# Altium PCB XPIRL_0V0.PCBDOC (part 1 of 4)
Units mil, origin at the board's own origin, x right, y up, seen from the top; angles counter-clockwise.
Board outline 3497.26 x 1372.5 mil, 6 copper layers (Top Layer, Mid-Layer 1, Mid-Layer 2, Mid-Layer 3, Mid-Layer 4, Bottom Layer); 217 components, 126 nets, 782 pads, 361 vias.
Unrouted connection lines stored in the file: 96.
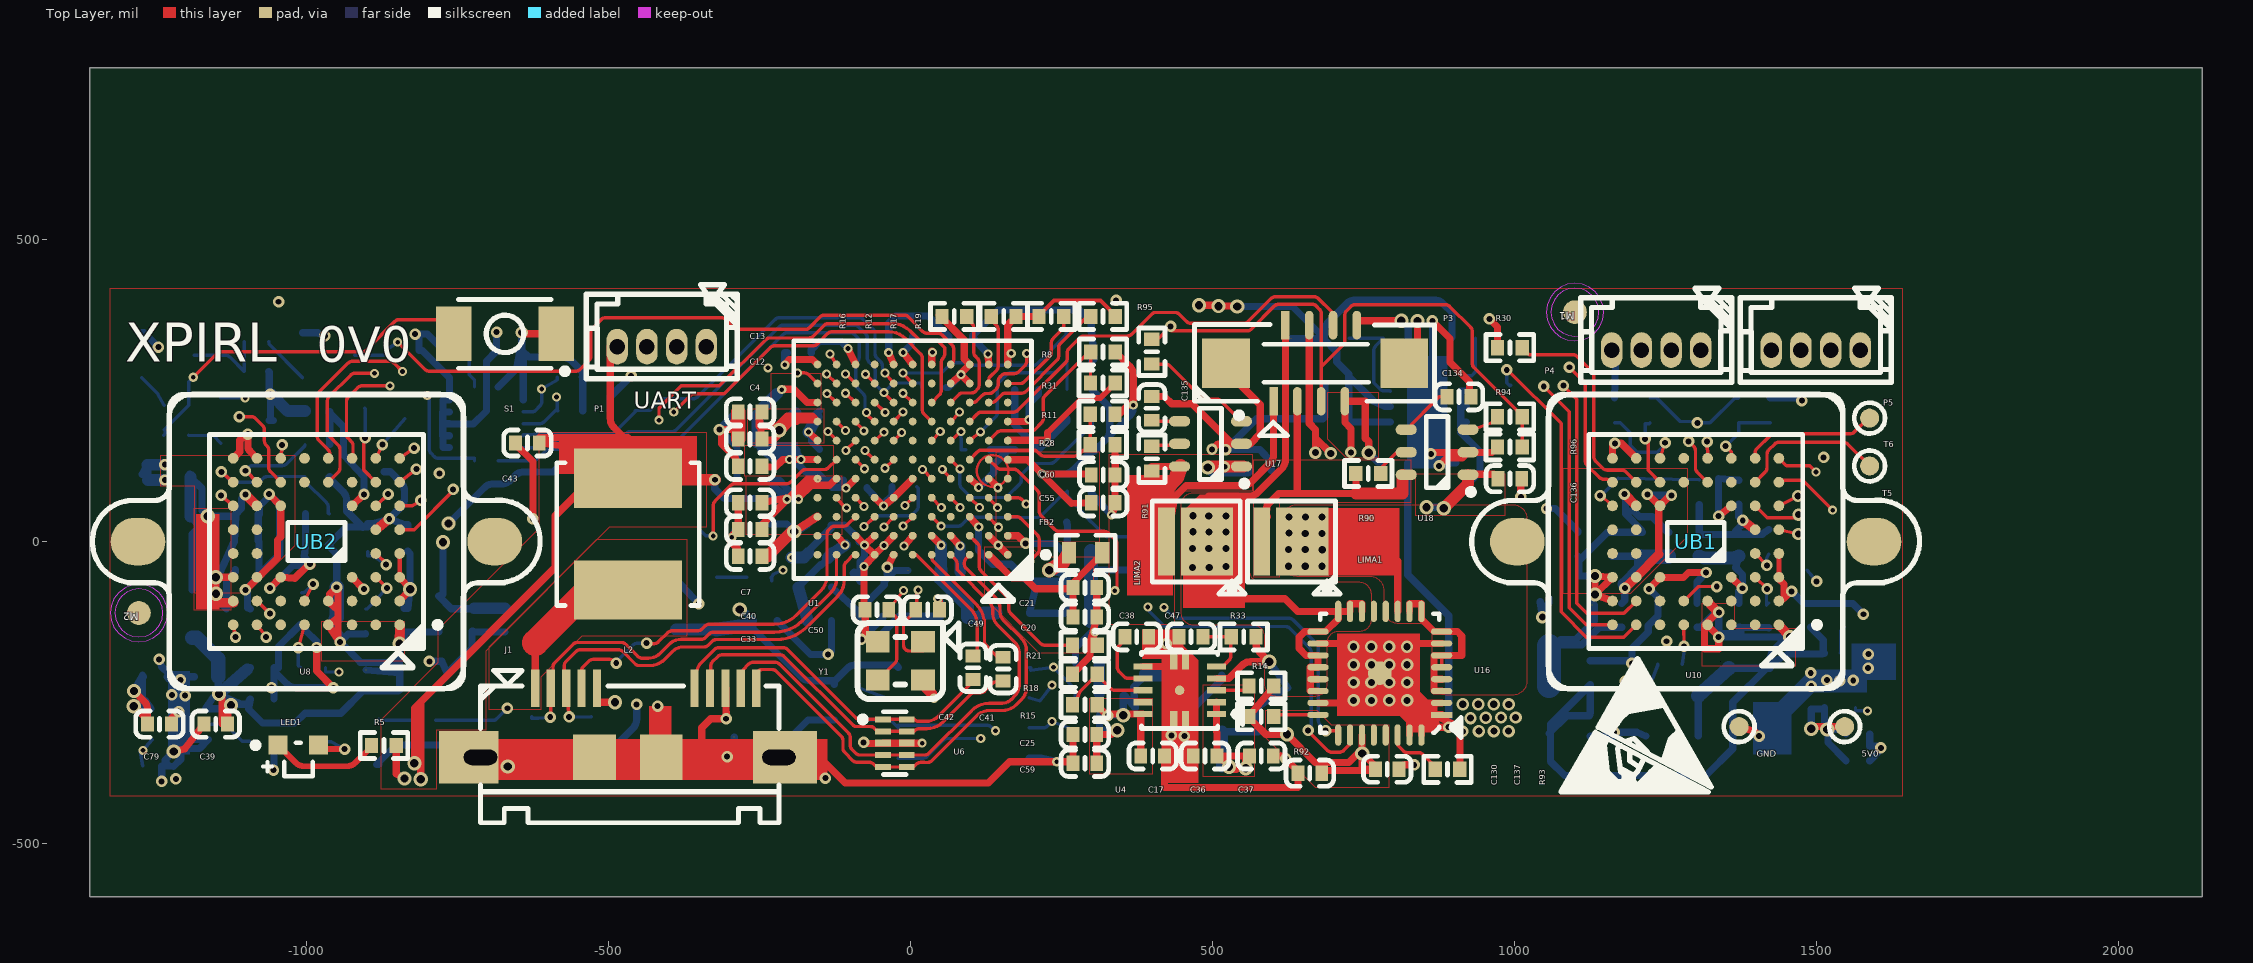
[diagram p0: Top Layer view]
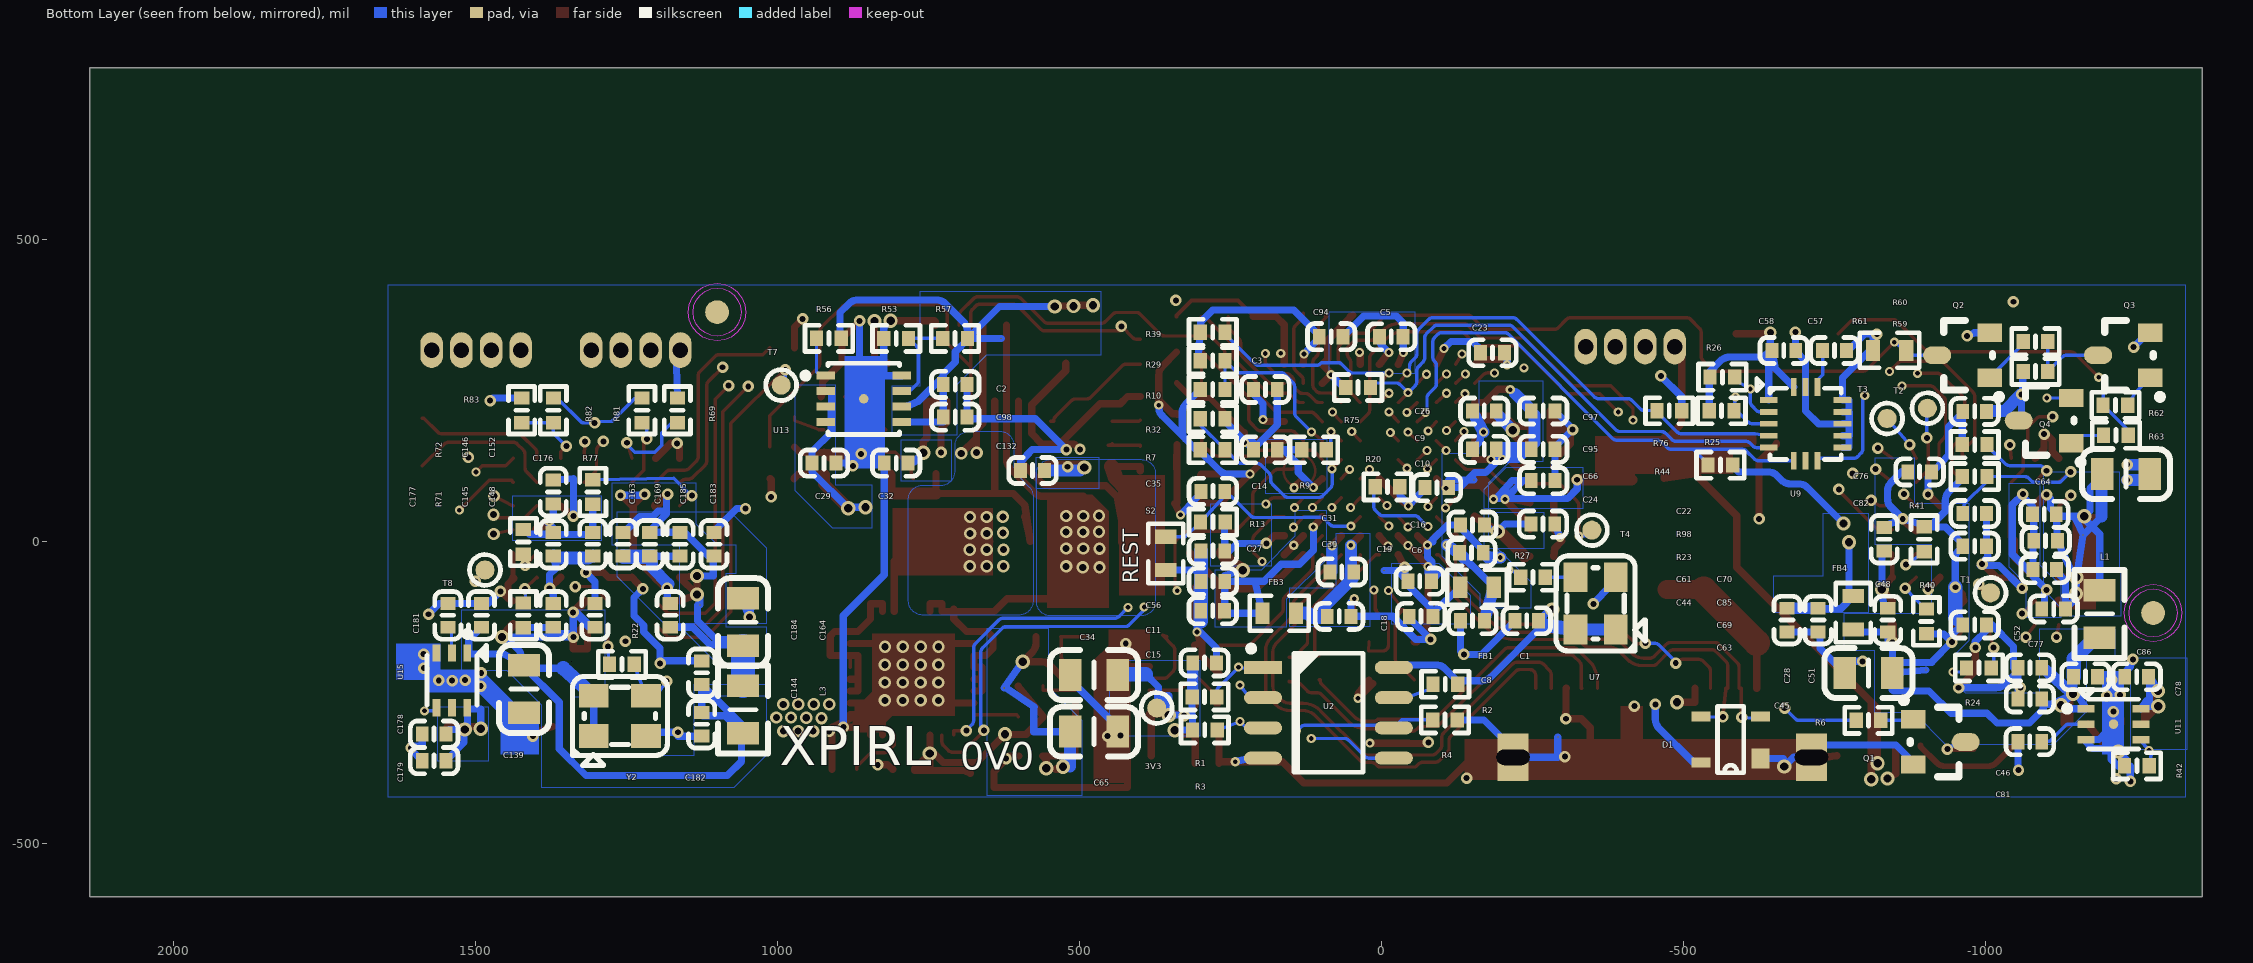
[diagram p1: Bottom Layer view, seen from below]
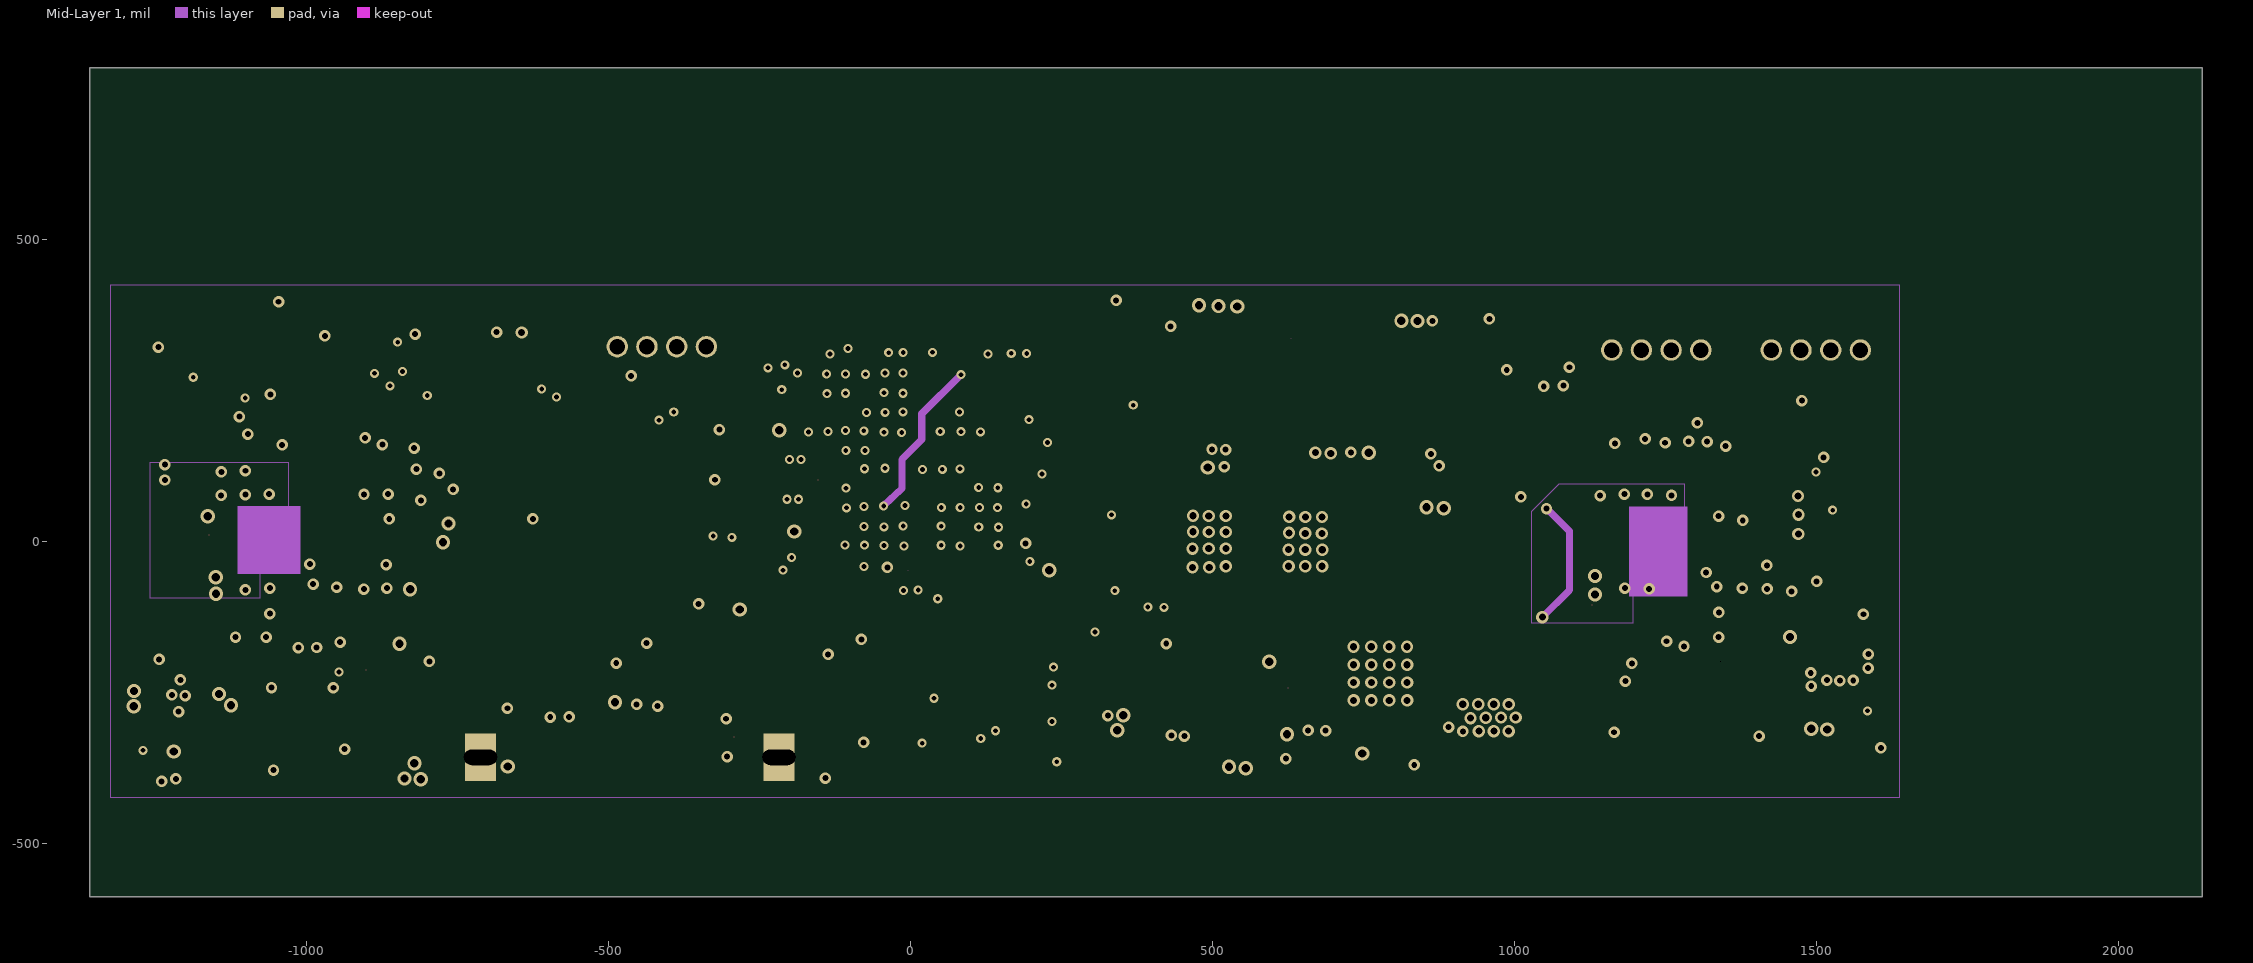
[diagram p2: Mid-Layer 1]
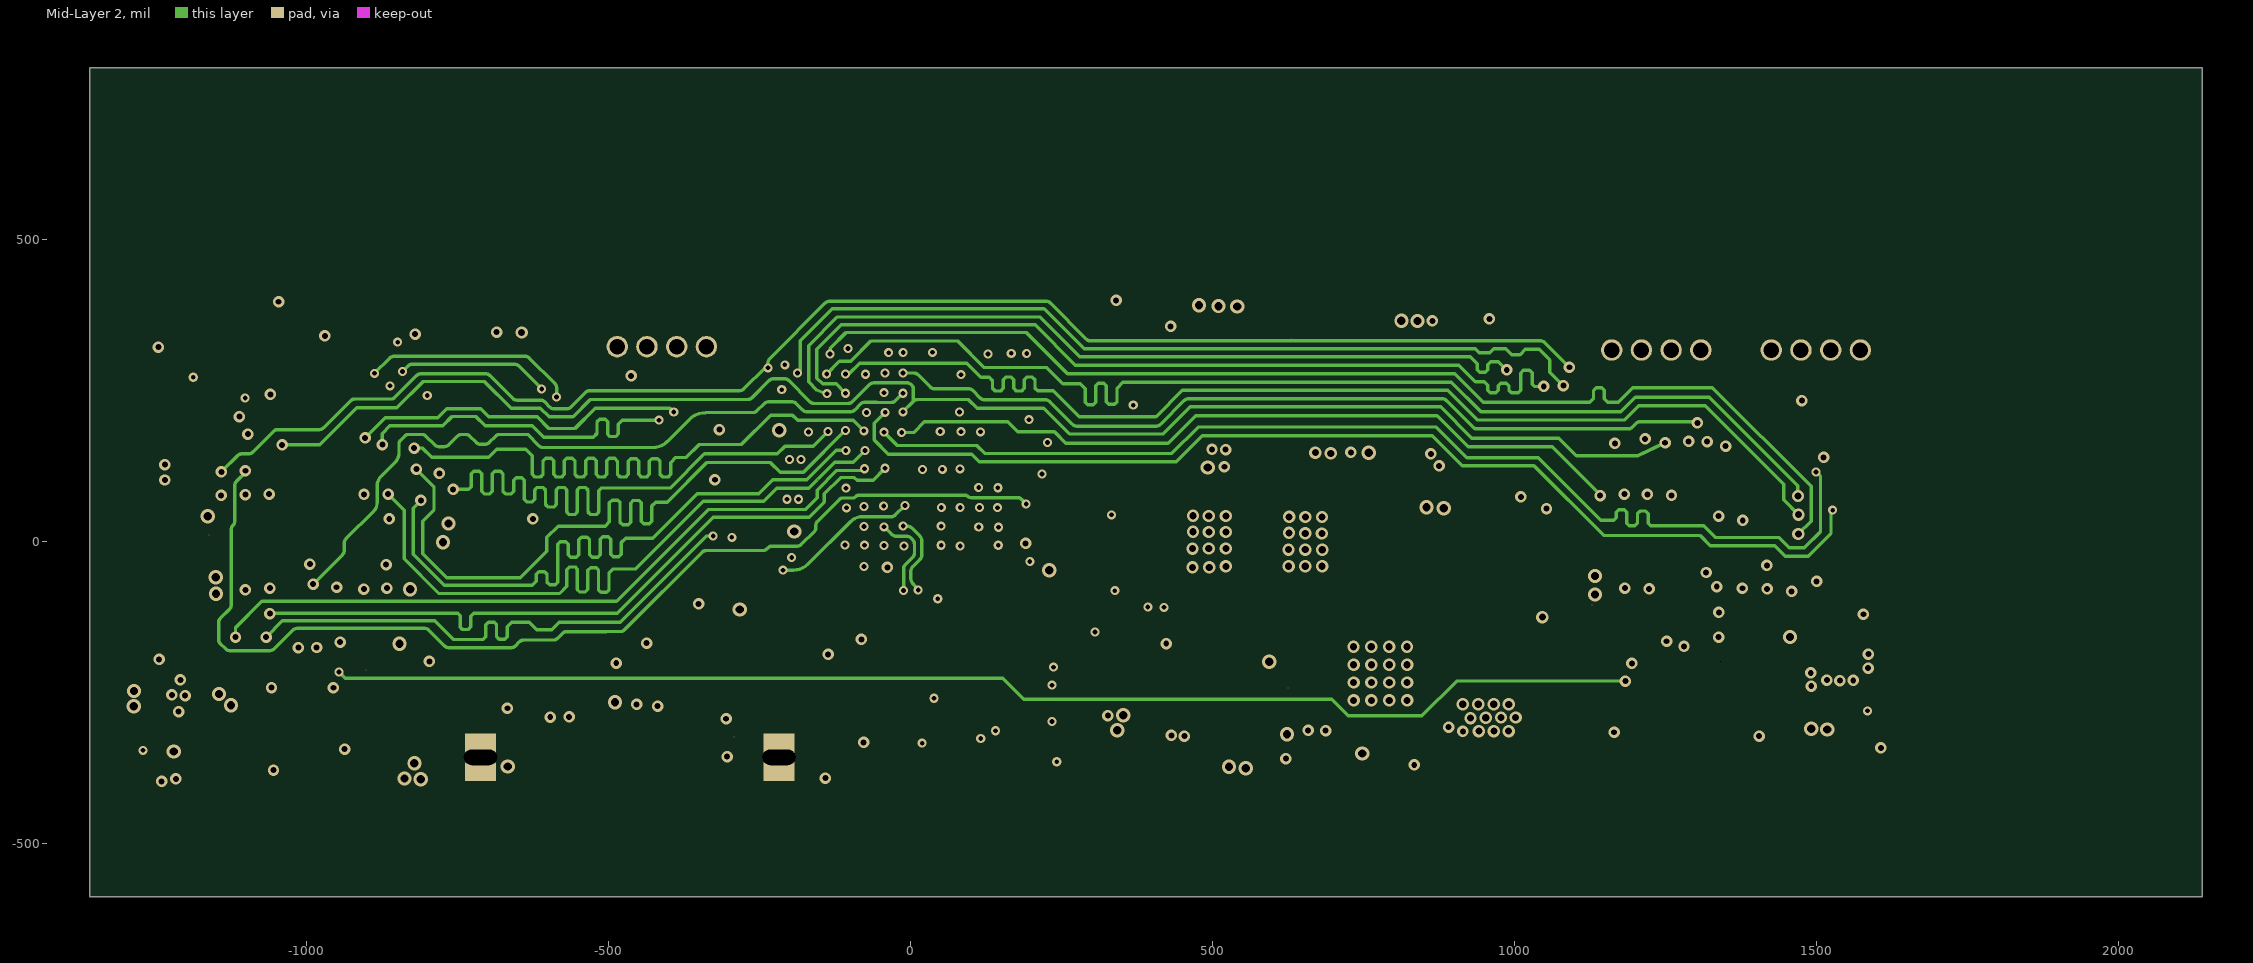
[diagram p3: Mid-Layer 2]
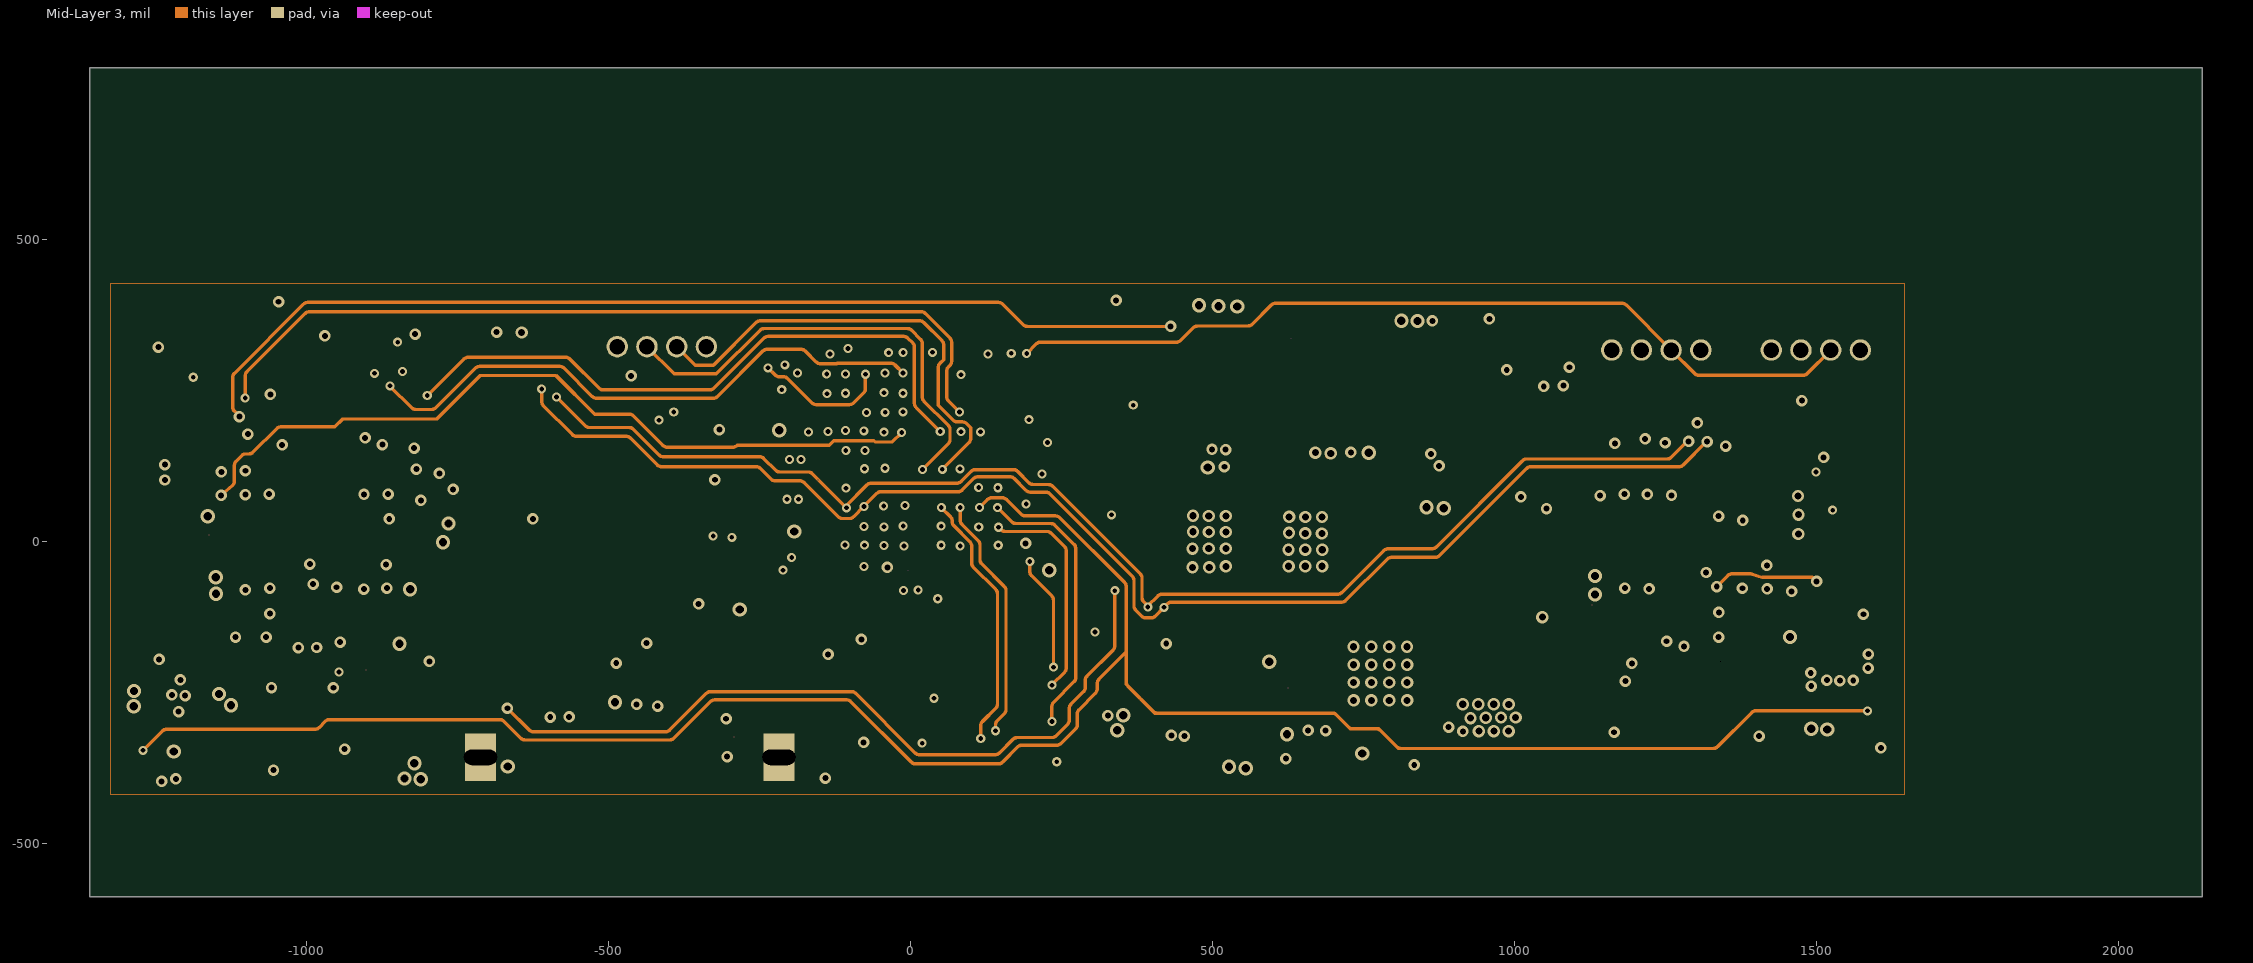
[diagram p4: Mid-Layer 3]
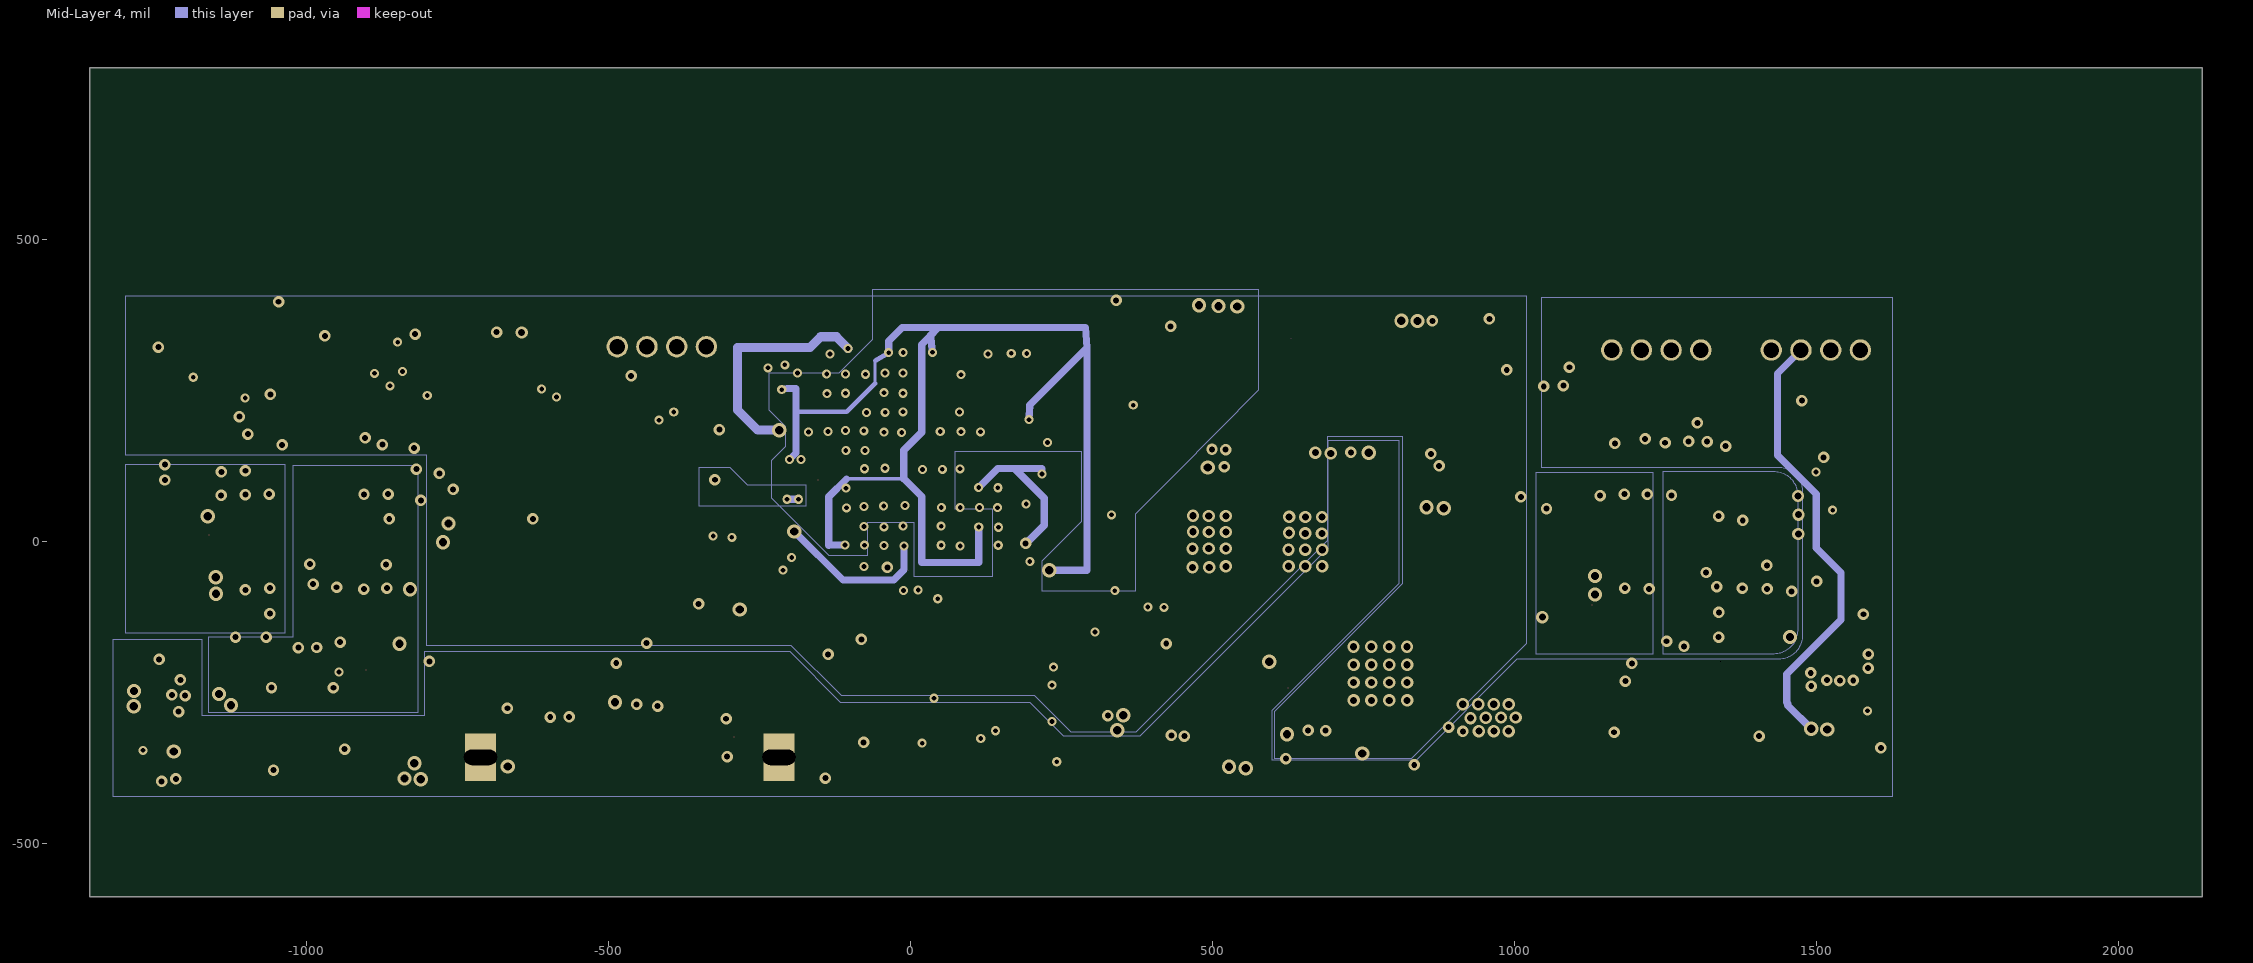
[diagram p5: Mid-Layer 4]

## Layer stack, top to bottom
Top Layer: signal copper 1.4
Dielectric: dielectric 12.6, FR-4, Dk 4.8
Mid-Layer 1: signal copper 1.4
Dielectric: dielectric 12.6, FR-4, Dk 4.8
Mid-Layer 2: signal copper 1.4
Dielectric: dielectric 12.6, FR-4, Dk 4.8
Mid-Layer 3: signal copper 1.4
Dielectric: dielectric 12.6, FR-4, Dk 4.8
Mid-Layer 4: signal copper 1.4
Dielectric: dielectric 12.6, FR-4, Dk 4.8
Bottom Layer: signal copper 1.4

## Board outline
-1359.44,-588.07 2137.81,-588.07 2137.81,784.43 -1359.44,784.43

## Design rules (kind name [scope] priority, off if disabled: settings)
Clearance [All] p1: gap=10
PlaneConnect "Power Plane Connect Style - pads with no thermal" [(Name='J1-13') Or (Name='M1-1') Or (Name='M2-1') Or (Name='P1-1') Or (Name='U1-FID1') Or (Name='U1-FID2') Or (Name='UB1-1') Or (Name='UB2-1')] p1: planeconnectstyle=NoConnect reliefexpansion=20 reliefentries=4 reliefconductorwidth=10 reliefairgap=10 // PAD - No Thermal Connect Rule
PlaneConnect "Power Plane Connect Style - from global settings" [All] p2: planeconnectstyle=Relief reliefexpansion=20 reliefentries=2 reliefconductorwidth=11.81 reliefairgap=10
PolygonConnect [All] p1: connectstyle=Relief reliefconductorwidth=10 reliefentries=4 polygonreliefangle="90 Angle"
RoutingVias [All] p1: holewidth=28 width=50 viastyle="Through Hole" minholewidth=28 minwidth=50 maxholewidth=28 maxwidth=50
SilkscreenOverComponentPads [All] p1: minsilkscreentomaskgap=10
SolderMaskExpansion "Solder Mask Expansion from CAM settings" [All] p1: expansion=2
Width [All] p1: maxlimit=10 minlimit=10 preferedwidth=10
26 further rules are at their usual default settings.

## Components (designator, comment, footprint, x,y, rotation, side; value= is the part's Value field where it differs from the comment)
3V3 "PAD_TP_D1.2B" PAD_TP_D1.2B 371.44,-275.44 r0 bottom
5V0 "PAD_TP_D1.2B" PAD_TP_D1.2B 1545.81,-306.32 r180 top
C1 "0.1uF" 0402C_L -241.15,-131.06 r180 bottom
C2 "4.7u" 0402C_L 705.07,260.27 r180 bottom
C3 "0.1uF" 0402C_L 191.55,251.8 r0 bottom
C4 "0.1uF" 0402C_L -266.2,124.55 r0 top
C5 "0.1uF" 0402C_L -16.84,339.13 r180 bottom
C6 "0.1uF" 0402C_L -149.56,-18.4 r0 bottom
C7 "4.7uF" 0402C_L -266.2,64.27 r0 top
C8 "0.1uF" 0402C_L -151.29,-131.06 r180 bottom
C9 "0.1uF" 0402C_L -170.92,152.73 r180 bottom
C10 "0.1uF" 0402C_L -92.45,89.35 r180 bottom
C11 "0.1uF" 0402C_L 278.79,-114.34 r180 bottom
C12 "0.1uF" 0402C_L -266.2,169.63 r0 top
C13 "0.01uF" 0402C_L -266.2,214.63 r0 top
C14 "0.1uF" 0402C_L 191.55,152 r180 bottom
C15 "0.1uF" 0402C_L 292.19,-200.8 r0 bottom
C16 "0.01uF" 0402C_L -151.44,27.51 r180 bottom
C17 "0.01uF" 0402C_L 400.23,-355.01 r180 top
C18 "4.7u" 0402C_L -66.19,-123.8 r0 bottom
C19 "0.1uF" 0402C_L -64.03,-65.49 r0 bottom
C20 "4.7u" 0402C_L 288.01,-124.95 r0 top
C21 "0.1uF" 0402C_L 288.01,-76.2 r180 top
C22 "0.01uF" 0402C_L -982.65,215.55 r180 bottom
C23 "0.1uF" 0402C_L -184.51,312.61 r0 bottom
C24 "4.7uF" 0402C_L -267.94,29.01 r0 bottom
C25 "4.7uF" 0402C_L 288.01,-319.48 r0 top
C26 "0.1uF" 0402C_L -170.92,216.22 r180 bottom
C27 "0.01uF" 0402C_L 278.43,-15.42 r180 bottom
C28 "4.7uF" 0402C_L -672.01,-129.97 r90 bottom
C29 "0.1uF" 0402C_L 922.28,129.94 r0 bottom
C30 "4.7u" 0402C_L 69.44,-123.8 r180 bottom
C31 "0.1uF" 0402C_L 64.97,-50.26 r180 bottom
C32 "4.7uF" 0402C_L 802.78,129.94 r0 bottom
C33 "0.1uF" 0402C_L -266.2,-24.44 r0 top
C34 "10uF" 0805C 475.33,-221.09 r180 bottom
C35 "0.1uF" 0402C_L 278.43,83.11 r180 bottom
C36 "2.2u" 0402C_L 487.04,-355.01 r180 top
C37 "0.1uF" 0402C_L 580.13,-355.01 r180 top
C38 "NC" 0402C_L 374.01,-157.68 r180 top
C39 "4.7uF" 0402C_L -1150.88,-302.13 r0 top
C40 "0.1uF" 0402C_L -266.2,20.02 r180 top
C41 "0.1uF" 0402C_L 152.57,-211.1 r270 top
C42 "0.1uF" 0402C_L 102.87,-208.84 r270 top
C43 "4.7uF" 0402C_L -634.88,163.28 r0 top
C44 "4.7uF" 0402C_L -982.65,-7.59 r0 bottom
C45 "10uF" 0805C -807,-217.72 r180 bottom
C46 "0.1uF" 0402C_L -1074.18,-260.61 r180 bottom
C47 "0.1UF" 0402C_L 463.62,-157.68 r0 top
C48 "0.1uF" 0402C_L -838.86,-129.97 r270 bottom
C49 "12pF" 0402C_L 27.67,-112.8 r180 top
C50 "12pF" 0402C_L -56.33,-112.8 r180 top
C51 "0.1uF" 0402C_L -723.52,-129.97 r90 bottom
C52 "0.01uF" 0402C_L -982.65,-137.92 r0 bottom
C55 "4.7u" 0402C_L 318.31,64.2 r0 top
C56 "4.7u" 0402C_L 278.43,-65.89 r0 bottom
C57 "0.47uF" 0402C_L -750.63,316.43 r0 bottom
C58 "0.1uF" 0402C_L -666.74,316.43 r0 bottom
C59 "0.1uF" 0402C_L 288.01,-367.12 r0 top
C60 "4.7uF" 0402C_L 318.29,110.35 r180 top
C61 "0.1uF" 0402C_L -982.65,46.33 r0 bottom
C63 "4.7uF" 0402C_L -1113.47,-111.49 r180 bottom
C64 "10uF" 0805C -1233.37,111.65 r0 bottom
C65 "10uF" 0805C 475.33,-314.68 r0 bottom
C66 "0.01uF" 0402C_L -268.41,100.99 r0 bottom
C69 "0.1uF" 0402C_L -1098.77,-46.39 r180 bottom
C70 "4.7uF" 0402C_L -1098.07,45.32 r180 bottom
C76 "4.7u" 0402C_L -891.57,115.42 r180 bottom
C77 "0.1uF" 0402C_L -1074.18,-209.05 r180 bottom
C78 "0.1uF" 0402C_L -1250.97,-223.77 r180 bottom
C79 "1uF" 0402C_L -1244.03,-302.13 r180 top
C81 "0.01uF" 0402C_L -1074.09,-331.23 r180 bottom
C82 "0.1uF" 0402C_L -833,3.86 r90 bottom
C85 "1nF" 0402C_L -1100.17,1.21 r180 bottom
C86 "4.7uF" 0402C_L -1166.28,-223.77 r0 bottom
C94 "0.01uF" 0402C_L 82.62,339.24 r180 bottom
C95 "4.7uF" 0402C_L -268.41,152.73 r0 bottom
C97 "0.01uF" 0402C_L -268.41,216.22 r0 bottom
C98 "0.01uF" 0402C_L 705.07,206.16 r0 bottom
C130 "4.7uF" 0402C_L 660.46,-383.38 r0 top
C132 "1uF" 0402C_L 577.02,117.75 r180 bottom
C134 "10pF" 0402C_L 907.45,239.71 r180 top
C135 "10pF" 0402C_L 398.79,220.59 r270 top
C136 "4.7uF" 0402C_L 991.61,104.18 r180 top
C137 "0.1uF" 0402C_L 788.63,-376.88 r180 top
C139 "10uF" 0805C 1418.8,-243.92 r90 bottom
C144 "4.7uF" 0402C_L 1124.77,-217.14 r270 bottom
C145 "4.7uF" 0402C_L 1370.55,-122.13 r270 bottom
C146 "0.1uF" 0402C_L 1370.55,-4.43 r90 bottom
C148 "0.01uF" 0402C_L 1301.53,-122.13 r270 bottom
C152 "4.7uF" 0402C_L 1305.01,-4.43 r90 bottom
C163 "4.7uF" 0402C_L 1255.02,-4.43 r90 bottom
C164 "10uF" 0805C 1056.31,-133.34 r270 bottom
C169 "0.1uF" 0402C_L 1210.62,-4.43 r90 bottom
C176 "4.7u" 0402C_L 1370.55,82.04 r90 bottom
C177 "0.1uF" 0402C_L 1489.27,-122.13 r270 bottom
C178 "0.1uF" 0402C_L 1567.75,-318.64 r180 bottom
C179 "4.7uF" 0402C_L 1567.75,-362.77 r180 bottom
C181 "0.01uF" 0402C_L 1544.95,-122.13 r270 bottom
C182 "0.1uF" 0402C_L 1124.77,-302.4 r90 bottom
C183 "0.1uF" 0402C_L 1104.34,-4.43 r270 bottom
C184 "0.01uF" 0402C_L 1176.98,-122.13 r270 bottom
C185 "1nF" 0402C_L 1160.58,-4.43 r90 bottom
D1 "PSR05" SOT-143 -578.71,-327.66 r0 bottom
FB1 "600@100MHz" 0603R -158.79,-75.64 r180 bottom
FB2 "600@100MHz" 0603R 289.15,-18.36 r180 top
FB3 "600@100MHz" 0603R 168.59,-118.5 r0 bottom
FB4 "600@100MHz" 0603R -781.89,-117.8 r90 bottom
GND "PAD_TP_D1.2B" PAD_TP_D1.2B 1371.16,-306.32 r180 top
J1 "USB3_MICROB" USB3_P65L130W51H28_TH -570.87,-414.21 r0 top
L1 "10uH" 0805R -1189.64,-119.64 r90 bottom
L2 "100uH" IND_L60W60H42_HPC6045 -468.39,12.36 r90 top
L3 "10uH" 0805R 1056.31,-278.25 r90 bottom
LED1 "LED0603" LED0603A_L170W06H06 -1014.02,-337.13 r180 top
LIMA1 "LIMA" LEDM_L35W34H36_BELICE_A 629.92,0 r0 top
LIMA2 "LIMA" LEDM_L35W34H36_BELICE_A 472.44,0 r0 top
M1 "PAD_MARK_D1-2" PAD_MARK_D1-2 1099.32,379.85 r180 top
M2 "PAD_MARK_D1-2" PAD_MARK_D1-2 -1278.12,-118.2 r180 top
P1 "UART" WAFER4_P1.25L6.25W3.4H4.3 -338.58,322.73 r180 top
P3 "FPC_8H" FPC8_P50L102L40W30H40 669.29,295.28 r90 top
P4 "UART" WAFER4_P1.25L6.25W3.4H4.3 1307.76,317.13 r180 top
P5 "UART" WAFER4_P1.25L6.25W3.4H4.3 1571.88,317.13 r180 top
Q1 "BC817" SOT-23L -922.51,-331.65 r180 bottom
Q2 "BC817" SOT-23L -965.93,308.54 r0 bottom
Q3 "BC817" SOT-23L -1232.2,308.54 r0 bottom
Q4 "BC817" SOT-23L -1100.97,200.45 r0 bottom
R1 "4.7K" 0402R_L 292.38,-257.13 r180 bottom
R2 "4.7K" 0402R_L -106.29,-236.18 r180 bottom
R3 "4.7K" 0402R_L 291.8,-311.75 r180 bottom
R4 "100K" 0402R_L -105.86,-295.26 r0 bottom
R5 "1K" 0402R_L -872.42,-337.66 r180 top
R6 "200R" 0402R_L -807,-295.95 r180 bottom
R7 "NC" 0402R_L 278.79,152 r0 bottom
R8 "4.7K" 0402R_L 318.04,313.94 r0 top
R9 "10K" 0402R_L 111.05,152 r180 bottom
R10 "NC" 0402R_L 278.79,251.8 r0 bottom
R11 "NC" 0402R_L 317.54,210.71 r0 top
R12 "4.7K" 0402R_L 153.62,372.74 r0 top
R13 "100K" 0402R_L 278.43,32.32 r0 bottom
R14 "1K" 0402R_L 580.13,-238.88 r180 top
R15 "4.7K" 0402R_L 288.01,-270.15 r180 top
R16 "4.7K" 0402R_L 71.91,372.74 r180 top
R17 "4.7K" 0402R_L 232.42,372.74 r180 top
R18 "1.5K" 0402R_L 288.01,-219.67 r180 top
R19 "4.7K" 0402R_L 318.04,372.74 r0 top
R20 "6.04K" 0402R_L -10.69,90.67 r180 bottom
R21 "200R" 0402R_L 288.01,-171.75 r0 top
R22 "0R" 0402R_L 1256.79,-203.17 r180 bottom
R23 "10K" 0402R_L -982.65,107.66 r0 bottom
R24 "22R" 0402R_L -989.73,-209.07 r0 bottom
R25 "2.2K" 0402R_L -563.73,216.62 r180 bottom
R26 "2.2K" 0402R_L -565.05,272.34 r180 bottom
R27 "22R" 0402R_L -251.55,-59.07 r180 bottom
R28 "4.7K" 0402R_L 317.54,160.43 r0 top
R29 "4.7K" 0402R_L 278.79,299.33 r0 bottom
R30 "0R" 0402R_L 991.61,320.99 r180 top
R31 "NC\" 0402R_L 317.79,262.58 r0 top
R32 "4.7K" 0402R_L 278.79,203.25 r180 bottom
R33 "6.04K" 0402R_L 550.89,-157.68 r180 top
R39 "10K" 0402R_L 278.79,346.6 r0 bottom
R40 "10K" 0402R_L -902.82,-132.14 r270 bottom
R41 "10K" 0402R_L -899.16,3.86 r90 bottom
R42 "10K" 0402R_L -1251.31,-371.21 r0 bottom
R44 "10K" 0402R_L -561.74,126.67 r180 bottom
R53 "30.1K" 0402R_L 802.78,336.32 r0 bottom
R56 "100K" 0402R_L 914.19,336.49 r0 bottom
R57 "0R" 0402R_L 705.26,336.32 r0 bottom
R59 "1K" 0402R_L -1083.42,281.57 r0 bottom
R60 "22R" 0402R_L -1083.42,331.03 r180 bottom
R61 "NC" 0603R -841.78,316.43 r180 bottom
R62 "1k" 0402R_L -1215.76,225.7 r180 bottom
R63 "1k" 0402R_L -1216.54,176.12 r0 bottom
R69 "4.7K" 0402R_L 1164.93,217.33 r270 bottom
R71 "10K" 0402R_L 1420,-122.13 r270 bottom
R72 "10K" 0402R_L 1420,-0.6 r90 bottom
R75 "4.7K" 0402R_L 38.04,255.1 r180 bottom
R76 "4.7K" 0402R_L -477.13,216.62 r0 bottom
R77 "4.7K" 0402R_L 1305.01,82.04 r270 bottom
R81 "10K" 0402R_L 1223.66,217.33 r90 bottom
R82 "10K" 0402R_L 1370.31,217.33 r270 bottom
R83 "10K" 0402R_L 1422.82,217.33 r90 bottom
R90 "100R" 0402R_L 757.13,112.69 r0 top
R91 "100R" 0402R_L 398.79,137.25 r90 top
R92 "10k" 0402R_L 580.13,-289.7 r180 top
R93 "158R" 0402R_L 888.39,-377.05 r0 top
R94 "0R" 0402R_L 991.61,206.55 r0 top
R95 "0R" 0402R_L 398.79,314.35 r90 top
R96 "4.7k" 0402R_L 991.61,156.58 r0 top
R98 "4.7K" 0402R_L -982.65,160.6 r180 bottom
S1 "N_RL" SW_L40W30H25_MPTFP -672.07,343.88 r180 top
S2 "Reset" 0603R 356.5,-19.59 r270 bottom
T1 "CON1" PAD_TP_D1.2B -1008.93,-84.89 r180 bottom
T2 "CON1" PAD_TP_D1.2B -904.49,220.76 r180 bottom
T3 "CON1" PAD_TP_D1.2B -837.71,203.79 r0 bottom
T4 "CON1" PAD_TP_D1.2B -349.06,19.02 r180 bottom
T5 "CON1" PAD_TP_D1.2B 1587.13,125.22 r0 top
T6 "CON1" PAD_TP_D1.2B 1587.13,204.45 r0 top
T7 "CON1" PAD_TP_D1.2B 993.14,259.01 r180 bottom
T8 "CON1" PAD_TP_D1.2B 1483.52,-46.98 r180 bottom
U1 "CYUSB3014" FBGA121_P80L100W100H11 2.88,135.69 r180 top
U2 "M25P40-VMN3TPB" SO8N_P127L50W40W62H17 87.14,-283.46 r180 bottom
U4 "TPS74801DRCR" SON10_P50L32W32H10_DRC 444.88,-246.24 r180 top
U6 "SP3010-04UTG" UDFN10_SON_P50L25W10H55 -26.67,-333.74 r0 top
U7 "XTAL-3225" XTAL_3225 -355.14,-102.36 r90 bottom
U8 "MT9V024IA7XTM" IBGA52_8X8_P100L90W90H90R -984.25,0 r180 top
U9 "ICM-20608-G" LGA16_P50L30W30H08 -702.78,194.99 r180 bottom
U10 "MT9V024IA7XTM" IBGA52_8X8_P100L90W90H90R 1299.21,0 r180 top
U11 "TPS73533" SON6_P65L21W21H8_DRV -1212.6,-302.19 r180 bottom
U13 "AS1364-BTDT-AD" TDFN8_P65L30W30H08 856.46,236.35 r180 bottom
U15 "TPS73533" SON6_P65L21W21H8_DRV 1538.21,-229.73 r270 bottom
U16 "TLC59116IRHBR" QFN32_P5L50W50H10 776.24,-217.93 r180 top
U17 "TPS22918DBVT" SOT23-6_P95L300W280H120 496.06,161.73 r180 top
U18 "TPS22918DBVT" SOT23-6_P95L300W280H120 871.14,148.01 r180 top
UB1 "PAD_D6-D3.4" PAD_D6-D3.4 1299.21,0 r0 top
UB2 "PAD_D6-D3.4" PAD_D6-D3.4 -984.25,0 r0 top
Y1 "19.2MHz--2520" XATL2520L_L25W20H06 -17.39,-197.57 r270 top
Y2 "HSO531S_3225 27Mhz" XTAL_3225 1260.1,-288.58 r180 bottom

## Footprints (in the part's own frame and the unit in brackets; to place one, negate y for a bottom-side part, rotate by r counter-clockwise, add the part's x,y. Pads: shape width x height; smd on the part's side, far side on the other; paste and mask are expansions set on the pad)
0402C_L [mm]
  rect 0.54x0.64 smd: 1(-0.5,0) 2(0.5,0)
  silkscreen extent -1,-0.55 1,0.55
0402R_L [mm]
  rect 0.56x0.64 smd: 1(-0.52,0) 2(0.52,0)
  silkscreen extent -1,-0.55 1,0.55
0603R [mm]
  rect 0.6x0.9 smd: 1(-0.7,0) 2(0.7,0)
  silkscreen extent -1.25,-0.74 1.25,0.74
0805C [mm]
  rect 0.95x1.35 smd: 1(-1,0) 2(1,0)
  silkscreen extent -1.85,-1.05 1.85,1.05
0805R [mm]
  rect 0.95x1.35 smd: 1(-1,0) 2(1,0)
  silkscreen extent -1.85,-1.05 1.85,1.05
FBGA121_P80L100W100H11 [mm]
  round 0.33 smd: A1(-4,4) A2(-3.2,4) A3(-2.4,4) A4(-1.6,4) A5(-0.8,4) A6(0,4) A7(0.8,4) A8(1.6,4) A9(2.4,4) A10(3.2,4) A11(4,4) B1(-4,3.2) B2(-3.2,3.2) B3(-2.4,3.2) B4(-1.6,3.2) B5(-0.8,3.2) B6(0,3.2) B7(0.8,3.2) B8(1.6,3.2) B9(2.4,3.2) B10(3.2,3.2) B11(4,3.2) C1(-4,2.4) C2(-3.2,2.4) C3(-2.4,2.4) C4(-1.6,2.4) C5(-0.8,2.4) C6(0,2.4) C7(0.8,2.4) C8(1.6,2.4) C9(2.4,2.4) C10(3.2,2.4) C11(4,2.4) D1(-4,1.6) D2(-3.2,1.6) D3(-2.4,1.6) D4(-1.6,1.6) D5(-0.8,1.6) D6(0,1.6) D7(0.8,1.6) D8(1.6,1.6) D9(2.4,1.6) D10(3.2,1.6) D11(4,1.6) E1(-4,0.8) E2(-3.2,0.8) E3(-2.4,0.8) E4(-1.6,0.8) E5(-0.8,0.8) E6(0,0.8) E7(0.8,0.8) E8(1.6,0.8) E9(2.4,0.8) E10(3.2,0.8) E11(4,0.8) F1(-4,0) F2(-3.2,0) F3(-2.4,0) F4(-1.6,0) F5(-0.8,0) F6(0,0) F7(0.8,0) F8(1.6,0) F9(2.4,0) F10(3.2,0) F11(4,0) G1(-4,-0.8) G2(-3.2,-0.8) G3(-2.4,-0.8) G4(-1.6,-0.8) G5(-0.8,-0.8) G6(0,-0.8) G7(0.8,-0.8) G8(1.6,-0.8) G9(2.4,-0.8) G10(3.2,-0.8) G11(4,-0.8) H1(-4,-1.6) H2(-3.2,-1.6) H3(-2.4,-1.6) H4(-1.6,-1.6) H5(-0.8,-1.6) H6(0,-1.6) H7(0.8,-1.6) H8(1.6,-1.6) H9(2.4,-1.6) H10(3.2,-1.6) H11(4,-1.6) J1(-4,-2.4) J2(-3.2,-2.4) J3(-2.4,-2.4) J4(-1.6,-2.4) J5(-0.8,-2.4) J6(0,-2.4) J7(0.8,-2.4) J8(1.6,-2.4) J9(2.4,-2.4) J10(3.2,-2.4) J11(4,-2.4) K1(-4,-3.2) K2(-3.2,-3.2) K3(-2.4,-3.2) K4(-1.6,-3.2) K5(-0.8,-3.2) K6(0,-3.2) K7(0.8,-3.2) K8(1.6,-3.2) K9(2.4,-3.2) K10(3.2,-3.2) K11(4,-3.2) L1(-4,-4) L2(-3.2,-4) L3(-2.4,-4) L4(-1.6,-4) L5(-0.8,-4) L6(0,-4) L7(0.8,-4) L8(1.6,-4) L9(2.4,-4) L10(3.2,-4) L11(4,-4)
  round 1 on Mech16: FID1(-5.85,-5.85) FID2(5.85,5.85)
  silkscreen extent -5.72,-5 5,5
FPC8_P50L102L40W30H40 [mm]
  rect 1.2x0.36 smd: 1(-1.6,1.75) 2(1.6,1.25)
  oval 1.2x0.36 smd: 3(-1.6,0.75) 4(1.6,0.25) 5(-1.6,-0.25) 6(1.6,-0.75) 7(-1.6,-1.25) 8(1.6,-1.75)
  rect 2.1x2 smd: 9(0,3.75) 10(0,-3.75)
  silkscreen extent -3.05,-5.02 1.63,5.07
IBGA52_8X8_P100L90W90H90R [mm]
  round 0.45 smd: A1(-3.5,3.5) A2(-2.5,3.5) A3(-1.5,3.5) A4(-0.5,3.5) A5(0.5,3.5) A6(1.5,3.5) A7(2.5,3.5) A8(3.5,3.5) B1(-3.5,2.5) B2(-2.5,2.5) B3(-1.5,2.5) B4(-0.5,2.5) B5(0.5,2.5) B6(1.5,2.5) B7(2.5,2.5) B8(3.5,2.5) C1(-3.5,1.5) C2(-2.5,1.5) C3(-1.5,1.5) C6(1.5,1.5) C7(2.5,1.5) C8(3.5,1.5) D1(-3.5,0.5) D2(-2.5,0.5) D7(2.5,0.5) D8(3.5,0.5) E1(-3.5,-0.5) E2(-2.5,-0.5) E7(2.5,-0.5) E8(3.5,-0.5) F1(-3.5,-1.5) F2(-2.5,-1.5) F3(-1.5,-1.5) F6(1.5,-1.5) F7(2.5,-1.5) F8(3.5,-1.5) G1(-3.5,-2.5) G2(-2.5,-2.5) G3(-1.5,-2.5) G4(-0.5,-2.5) G5(0.5,-2.5) G6(1.5,-2.5) G7(2.5,-2.5) G8(3.5,-2.5) H1(-3.5,-3.5) H2(-2.5,-3.5) H3(-1.5,-3.5) H4(-0.5,-3.5) H5(0.5,-3.5) H6(1.5,-3.5) H7(2.5,-3.5) H8(3.5,-3.5)
  silkscreen extent -5.23,-4.5 4.5,4.5
IND_L60W60H42_HPC6045 [mm]
  rect 2.5x4.55 smd: 1(-2.35,0) 2(2.35,0)
  silkscreen extent -3,-3 3,3
LED0603A_L170W06H06 [mm]
  rect 0.8x0.8 smd: 1(0.85,0) 2(-0.85,0)
  silkscreen extent -0.6,-0.12 1.92,1.3
LEDM_L35W34H36_BELICE_A [mm]
  rect 0.7x2.85 smd: 1(-1.25,0)
  rect 2.2x2.85 smd: 2(0.45,0)
  silkscreen extent -1.85,-2.2 2.05,1.7
LGA16_P50L30W30H08 [mm]
  rect 0.75x0.24 smd: 1(-1.55,1) 2(-1.55,0.5) 3(-1.55,0) 4(-1.55,-0.5) 5(-1.55,-1) 9(1.55,-1) 10(1.55,-0.5) 11(1.55,0) 12(1.55,0.5) 13(1.55,1)
  rect 0.24x0.75 smd: 6(-0.5,-1.55) 7(0,-1.55) 8(0.5,-1.55) 14(0.5,1.55) 15(0,1.55) 16(-0.5,1.55)
  silkscreen extent -2.05,-1.5 1.5,1.9
PAD_D6-D3.4 [mm]
  round 0 all layers, no hole: 1(0,0)
  oval 2.3x2 smd: 2(-7.5,0) 3(7.5,0)
  silkscreen extent -9.42,-6.2 9.41,6.2
PAD_MARK_D1-2 [mm]
  round 1 / inner round 0 / far side round 1 all layers, no hole mask+0.5: 1(0,0)
  Top Layer keep-out region: 1.009,0 0.974,0.261 0.873,0.504 0.713,0.713 0.504,0.873 0.261,0.974 0,1.009 -0.261,0.974 -0.504,0.873 -0.713,0.713 -0.873,0.504 -0.974,0.261 -1.009,0 -0.974,-0.261 -0.873,-0.504 -0.713,-0.713 -0.504,-0.873 -0.261,-0.974 0,-1.009 0.261,-0.974 0.504,-0.873 0.713,-0.713 0.873,-0.504 0.974,-0.261 1.009,0
  Top Layer keep-out region: 1.21,0 1.169,0.313 1.048,0.605 0.856,0.856 0.605,1.048 0.313,1.169 0,1.21 -0.313,1.169 -0.605,1.048 -0.856,0.856 -1.048,0.605 -1.169,0.313 -1.21,0 -1.169,-0.313 -1.048,-0.605 -0.856,-0.856 -0.605,-1.048 -0.313,-1.169 0,-1.21 0.313,-1.169 0.605,-1.048 0.856,-0.856 1.048,-0.605 1.169,-0.313 1.21,0
  Bottom Layer keep-out region: 1.009,0 0.974,0.261 0.873,0.504 0.713,0.713 0.504,0.873 0.261,0.974 0,1.009 -0.261,0.974 -0.504,0.873 -0.713,0.713 -0.873,0.504 -0.974,0.261 -1.009,0 -0.974,-0.261 -0.873,-0.504 -0.713,-0.713 -0.504,-0.873 -0.261,-0.974 0,-1.009 0.261,-0.974 0.504,-0.873 0.713,-0.713 0.873,-0.504 0.974,-0.261 1.009,0
  Bottom Layer keep-out region: 1.21,0 1.169,0.313 1.048,0.605 0.856,0.856 0.605,1.048 0.313,1.169 0,1.21 -0.313,1.169 -0.605,1.048 -0.856,0.856 -1.048,0.605 -1.169,0.313 -1.21,0 -1.169,-0.313 -1.048,-0.605 -0.856,-0.856 -0.605,-1.048 -0.313,-1.169 0,-1.21 0.313,-1.169 0.605,-1.048 0.856,-0.856 1.048,-0.605 1.169,-0.313 1.21,0
PAD_TP_D1.2B [mm]
  round 0.8 smd: 1(0,0)
  silkscreen extent -0.65,-0.65 0.65,0.65
QFN32_P5L50W50H10 [mm]
  rect 0.9x0.26 smd: 1(-2.6,1.75)
  oval 0.9x0.26 smd: 2(-2.6,1.25) 3(-2.6,0.75) 4(-2.6,0.25) 5(-2.6,-0.25) 6(-2.6,-0.75) 7(-2.6,-1.25) 8(-2.6,-1.75) 17(2.6,-1.75) 18(2.6,-1.25) 19(2.6,-0.75) 20(2.6,-0.25) 21(2.6,0.25) 22(2.6,0.75) 23(2.6,1.25) 24(2.6,1.75)
  oval 0.26x0.9 smd: 9(-1.75,-2.6) 10(-1.25,-2.6) 11(-0.75,-2.6) 12(-0.25,-2.6) 13(0.25,-2.6) 14(0.75,-2.6) 15(1.25,-2.6) 16(1.75,-2.6) 25(1.75,2.6) 26(1.25,2.6) 27(0.75,2.6) 28(0.25,2.6) 29(-0.25,2.6) 30(-0.75,2.6) 31(-1.25,2.6) 32(-1.75,2.6)
  round 1 smd: 33(0,0)
  Top Layer region: -1.55,1.05 -1.05,1.55 1.05,1.56 1.245,1.521 1.41,1.41 1.521,1.245 1.56,1.05 1.55,1.05 1.56,-1.05 1.521,-1.245 1.41,-1.41 1.245,-1.521 1.05,-1.56 1.05,-1.55 -1.05,-1.56 -1.245,-1.521 -1.41,-1.41 -1.521,-1.245 -1.56,-1.05 -1.55,-1.05 -1.55,1.05
  silkscreen extent -3.42,-2.5 2.5,2.7
SO8N_P127L50W40W62H17 [mm]
  rect 1.6x0.55 smd: 1(-2.75,1.905)
  oval 1.6x0.55 smd: 2(-2.75,0.635) 3(-2.75,-0.635) 4(-2.75,-1.905) 5(2.75,-1.905) 6(2.75,-0.635) 7(2.75,0.635) 8(2.75,1.905)
  silkscreen extent -3.38,-2.5 1.45,2.82
SON6_P65L21W21H8_DRV [mm]
  rect 0.72x0.32 smd: 1(-1.15,0.65) 2(-1.15,0) 3(-1.15,-0.65) 4(1.15,-0.65) 5(1.15,0) 6(1.15,0.65)
  round 0.4 smd: 7(0,0)
  Top Layer region: -0.4,0.6 -0.2,0.8 0.2,0.804 0.278,0.788 0.344,0.744 0.388,0.678 0.404,0.6 0.4,0.6 0.404,-0.6 0.388,-0.678 0.344,-0.744 0.278,-0.788 0.2,-0.804 0.2,-0.8 -0.2,-0.804 -0.278,-0.788 -0.344,-0.744 -0.388,-0.678 -0.404,-0.6 -0.4,-0.6 -0.4,0.6
  silkscreen extent -2.08,-1.05 1.05,1.45
SON10_P50L32W32H10_DRC [mm]
  rect 0.8x0.26 smd: 1(-1.55,1) 2(-1.55,0.5) 3(-1.55,0) 4(-1.55,-0.5) 5(-1.55,-1) 6(1.55,-1) 7(1.55,-0.5) 8(1.55,0) 9(1.55,0.5) 10(1.55,1)
  round 0.4 smd: 11(0,0)
  rect 0.3x0.75 smd: 12(-0.25,1.25) 13(0.25,1.25) 14(-0.25,-1.25) 15(0.25,-1.25)
  Top Layer region: -0.65,0.9 -0.45,1.1 0.45,1.104 0.528,1.088 0.594,1.044 0.638,0.978 0.654,0.9 0.65,0.9 0.654,-0.9 0.638,-0.978 0.594,-1.044 0.528,-1.088 0.45,-1.104 0.45,-1.1 -0.45,-1.104 -0.528,-1.088 -0.594,-1.044 -0.638,-0.978 -0.654,-0.9 -0.65,-0.9 -0.65,0.9
  silkscreen extent -2.65,-1.6 1.6,1.6
SOT23-6_P95L300W280H120 [mm]
  oval 0.89x0.44 smd: 1(-1.3,0.95) 2(-1.3,0) 3(-1.3,-0.95) 4(1.3,-0.95) 5(1.3,0) 6(1.3,0.95)
  silkscreen extent -1.55,-1.5 0.46,1.79
SOT-23L [mm]
  rect 1.03x0.77 smd: 1(-1.05,0.95) 2(-1.05,-0.95)
  oval 1.18x0.75 smd: 3(1.15,0)
  silkscreen extent -1.58,-1.46 0.87,1.87
SOT-143 [mm]
  rect 0.75x0.85 smd: 1(-1.25,0.8)
  rect 0.8x0.42 smd: 2(-1.25,-0.96) 3(1.25,-0.96) 4(1.25,0.96)
  silkscreen extent -0.55,-1.4 0.55,1.4
SW_L40W30H25_MPTFP [mm]
  rect 1.5x2.3 smd: 1(-2.15,0) 2(2.15,0)
  silkscreen extent -2.65,-1.45 1.95,1.69
TDFN8_P65L30W30H08 [mm]
  rect 0.78x0.33 smd: 1(-1.6,0.975) 2(-1.6,0.325) 3(-1.6,-0.325) 4(-1.6,-0.975) 5(1.6,-0.975) 6(1.6,-0.325) 7(1.6,0.325) 8(1.6,0.975)
  round 0.4 smd: 9(0,0)
  Top Layer region: -0.675,0.6 -0.475,0.8 0.475,0.804 0.553,0.788 0.619,0.744 0.663,0.678 0.679,0.6 0.675,0.6 0.679,-0.6 0.663,-0.678 0.619,-0.744 0.553,-0.788 0.475,-0.804 0.475,-0.8 -0.475,-0.804 -0.553,-0.788 -0.619,-0.744 -0.663,-0.678 -0.679,-0.6 -0.675,-0.6 -0.675,0.6
  silkscreen extent -2.58,-1.5 1.5,1.5
UDFN10_SON_P50L25W10H55 [mm]
  rect 0.66x0.25 smd: 1(-0.5,1) 2(-0.5,0.5) 4(-0.5,-0.5) 5(-0.5,-1) 6(0.5,-1) 7(0.5,-0.5) 9(0.5,0.5) 10(0.5,1)
  rect 0.66x0.3 smd: 3(-0.5,0) 8(0.5,0)
  silkscreen extent -1.47,-1.32 0.48,1.32
USB3_P65L130W51H28_TH [mm]
  rect 0.35x1.58 smd: 1(-1.3,4.35) 2(-0.65,4.35) 3(0,4.35) 4(0.65,4.35) 5(1.3,4.35) 6(5.4,4.35) 7(6.05,4.35) 8(6.7,4.35) 9(7.35,4.35) 10(8,4.35)
  rect 1.3x2 hole 0.65 slot 1.4 at 0 deg: 11(-3.6,1.45) 12(8.95,1.45)
  round 0 all layers, no hole: 13(3.5,4.4)
  rect 1.8x1.9 smd: 14(1.2,1.45) 15(4,1.45)
  rect 2.7x2.2 smd: 16(9.2,1.45)
  rect 2.5x2.2 smd: 17(-4.1,1.45)
  silkscreen extent -3.6,-1.3 8.95,5.1
WAFER4_P1.25L6.25W3.4H4.3 [mm]
  oval 0.9x1.5 / inner round 0.9 / far side oval 0.95x1.5 hole 0.65: 1(0,0) 2(1.25,0) 3(2.5,0) 4(3.75,0)
  silkscreen extent -1.31,-2.6 5.05,1.35
XATL2520L_L25W20H06 [mm]
  rect 0.9x1 smd: 1(-0.8,0.95) 2(-0.8,-0.95) 3(0.8,-0.95) 4(0.8,0.95)
  silkscreen extent -1.6,-1.8 1.6,2.45
XTAL_3225 [mm]
  rect 1.25x1 smd: 1(-1.1,-0.85) 2(1.1,-0.85) 3(1.1,0.85) 4(-1.1,0.85)
  silkscreen extent -2,-2.08 2,1.66

## Via types
v1: diameter 19, hole 9.84, Top Layer to Bottom Layer, 139 vias
v2: diameter 15, hole 7.87, Top Layer to Bottom Layer, 113 vias
v3: diameter 20.47, hole 11.81, Top Layer to Bottom Layer, 58 vias
v4: diameter 23.62, hole 13.78, Top Layer to Bottom Layer, 42 vias
v5: diameter 0, hole 0, Top Layer to Bottom Layer, 9 vias

## Nets (pads, with @x,y where several pads share a name; then routed paths per layer and width w, separated by ;. In a path a pad name is that pad's centre, name@x,y a point inside that pad or via, vN(x,y) a via of type N, cw(c..) or ccw(c..) an arc to the next point about the centre after c; other vN are vias at no path point)
1V2: C2.1 C3.2 C4.2 C5.2 C6.2 C8.2 C9.2 C10.2 C11.2 C56.1 C94.2 C95.2 C97.2 C98.2 FB1.2 FB2.2 FB3.2 R56.1 R57.1 U1.B10 U1.C3 U1.E9 U1.F11 U1.H1 U1.J11 U1.L5 U1.L7 U13.5 U13.6 | length 5050
  Top Layer w5.6: v2(-181.9,135.75) U1.F11@-154.6,135.69 U1.F11@-156.66,135.69
  Top Layer w12: C4.2@-246.51,124.55 -225.17,122.72 -212.2,135.69 U1.F11@-156.66,135.69 ; v2(-213.89,251.56) -209.14,252.03 -193.45,252.03 -171.6,230.18 U1.J11@-154.6,230.18 ; v2(-201.05,135.95) U1.F11@-154.6,135.69 ; U1.B10@-123.11,9.71 v2(-109.32,-5.75) ; v2(-107.36,88.45) U1.E9@-91.61,104.19 ; v2(-36.84,312.69) U1.L7@-28.62,293.17 ; U1.L5@34.37,293.17 34.29,315.2 35.75,315.2 v2(35.78,313.26) ; U1.C3@97.37,41.2 111.79,24.12 v2(112.27,24.05) ; U1.H1@160.36,198.68 191.35,198.68 v2(195.58,201.86) ; v4(476.95,391.08) 508.08,391.08 v4(509.32,389.83) 539.95,389.83 v4(540.45,389.34)
  Top Layer w23.62: v4(229.11,-47.25) 251.85,-34.53 FB2.2@261.59,-18.36
  Mid-Layer 4 w5.12: -59.15,261.84 -59.15,299.27
  Mid-Layer 4 w5.91: -106.67,103.68 -11.83,103.68
  Mid-Layer 4 w7.87: -190.17,214.77 -106.22,214.77 -59.15,261.84 ; -59.15,299.27 v2(-36.84,312.69)
  Mid-Layer 4 w12: v2(-213.89,251.56) -204.98,253.31 -190.17,253.31 -190.17,214.77 -190.17,146.84 v2(-201.05,135.95) ; v2(-109.32,-5.75) -136.1,-5.95 -136.1,74.26 -106.67,103.68 ; v2(-36.84,312.69) -36.84,332.01 -14.56,354.29 ; v2(35.78,313.26) 32.87,336.99 ; v2(112.27,24.05) 112.27,-34.73 18,-34.73 18,74.81 -10.88,103.68 -11.83,103.68 -11.83,151.13 18,180.96 18,326.19 31.4,339.59 32.87,336.99 ; v2(195.58,201.86) 196.62,226.24 291.47,321.09 ; v4(229.11,-47.25) 291.47,-47.25 291.47,321.09 ; -14.56,354.29 45.62,354.29 ; -14.56,354.29 288.95,354.29 ; 32.87,336.99 31.4,340.06 45.62,354.29 ; 45.62,354.29 288.95,354.29 ; 288.95,354.29 291.47,321.09
  Bottom Layer w12: C95.2@-254.2,164.18 -243.97,153.05 C95.2@-248.72,152.73 -227.19,135.95 v2(-201.05,135.95) ; C97.2@-254.2,209.37 -244.14,220.33 C97.2@-248.72,216.22 C97.2@-244.14,222.61 ; -222.02,244.73 v2(-213.89,251.56) ; FB1.2@-186.35,-75.64 -183.44,-71.97 -149.43,-37.95 -148.99,-38.39 -148.99,-39.49 -129.88,-20.37 C6.2@-129.88,-18.4 ; v2(-181.9,135.75) -181.9,138.4 -188.99,145.49 -188.99,151.12 C9.2@-190.6,152.73 -190.6,132.09 -172.7,114.18 -155.11,114.18 -130.54,89.6 C10.2@-112.13,89.35 ; v5(-153.81,101.98) -112.13,101.98 C10.2@-112.13,89.35 ; v2(-107.36,88.45) -107.36,89.26 C10.2@-112.13,89.35 ; v2(-36.84,312.69) -36.84,338.82 C5.2@-36.53,339.13 -36.53,361.98 -24.95,373.55 28.62,373.55 C94.2@62.94,339.24 ; v2(112.27,24.05) 111.79,24.05 111.79,-14.44 134.97,-37.61 165.41,-37.61 193.26,-65.46 208.31,-65.46 ; v2(195.58,201.86) 195.58,228.09 211.24,243.75 C3.2@211.24,251.8 ; v4(229.11,-47.25) 259.11,-56.41 C56.1@258.75,-65.89 ; v4(540.45,389.34) 631.77,389.34 R57.1@684.78,336.32 ; v5(628.91,336.32) R57.1@684.78,336.32 ; U13.5@793.47,197.96 724.75,197.96 C98.2@724.75,206.16 C2.1@724.75,260.27 ; U13.6@793.47,223.55 785.21,223.55 766.12,232.2 724.94,273.37 C2.1@724.75,260.27 ; R56.1@893.72,336.49 895.66,338.43 895.66,379.2 880.93,393.93 ccw(c866.08,379.08) 866.08,400.08 736.44,400.08 ccw(c736.44,379.08) 721.59,393.93 690.94,363.28 ccw(c705.78,348.43) 684.78,348.43 R57.1@684.78,336.32 ; 208.31,-65.46 259.11,-65.46 C56.1@258.75,-65.89 ; 208.31,-65.46 208.79,-65.94 FB3.2@196.15,-118.5 254.95,-118.5 C11.2@259.11,-114.34 258.75,-113.98 C56.1@258.75,-65.89 ; R57.1@684.78,336.32 684.78,334.75 705.06,314.47 705.06,297.19 724.94,277.31 C2.1@724.75,260.27
  Bottom Layer w19.68: C95.2@-254.2,164.18 C97.2@-254.2,209.37 ; C97.2@-244.14,222.61 -222.02,244.73 ; FB1.2@-186.35,-75.64 C8.2@-170.97,-131.06 ; C6.2@-129.88,-18.4 -137.29,-26.88 -133.1,-22.68 v2(-109.32,-5.75)
1V2_AVDD: C18.1 C19.2 FB1.1 U1.A7 | length 225.5
  Top Layer w12: v1(-38.99,-42.76) U1.A7@-28.62,-21.79
  Bottom Layer w12: FB1.1@-131.23,-75.64 -85.71,-117.33 -85.71,-123.62 C18.1@-85.88,-123.8 -81.97,-119.89 -81.97,-109.44 -44.35,-71.82 C19.2@-44.35,-65.49 -26.74,-47.87 v5(-4.88,-47.87) ; C19.2@-38.99,-54.28 v1(-38.99,-42.76)
1V2_U3RX: C20.1 C21.2 FB2.1 U1.A2 | length 290.3
  Top Layer w12: U1.A2@128.86,-21.79 167.29,-60.21 188.17,-60.21 206.21,-78.25 266.28,-78.25 C21.2@268.33,-76.2 ; C20.1@268.33,-124.95 C21.2@268.33,-76.2 ; FB2.1@316.71,-18.36 314.98,-20.08 314.98,-20.54 309.63,-25.89 309.63,-27.31 268.33,-68.6 C21.2@268.33,-76.2
1V2_U3TX: C30.1 C31.2 FB3.1 U1.B5 | length 222.8
  Top Layer w12: U1.B5@34.37,9.71 v2(50.12,-6.04)
  Bottom Layer w12: C30.1@89.12,-123.8 95.62,-127.55 C30.1@93.99,-125.92
  Bottom Layer w19.68: C31.2@47.04,-60.6 93.99,-107.55 ; C31.2@50.12,-45.19 v2(50.12,-6.04)
  Bottom Layer w21.65: C31.2@47.04,-60.6 50.12,-57.52 C31.2@50.12,-45.19 ; 93.99,-107.55 93.99,-125.92 113.47,-125.92 120.89,-118.5 FB3.1@141.03,-118.5
3V3: 3V3.1 C1.2 C12.2 C13.2 C14.2 C15.2 C16.2 C17.2 C22.2 C23.2 C24.2 C25.2 C26.2 C27.2 C28.2 C29.2 C33.2 C34.2 C51.2 C55.1 C58.2 C59.2 C60.2 C130.2 C132.2 C136.2 C137.2 FB4.2 Q4.3 R1.1 R2.2 R3.1 R7.2 R8.2 R9.1 R10.2 R11.2 R13.1 R14.1 R15.1 R25.1 R26.1 R44.2 R59.2 R92.2 S1.1 U1.B1 U1.B6 U1.C11 U1.E3 U1.F1 U1.H11 U1.L9 U2.8 U4.9 U4.10 U7.1 U7.4 U9.1 U9.16 U13.2 U13.3 U13.4 U16.27 U17.1 U18.1 | length 6135.7
  Top Layer w5.6: v4(-217.8,184.43) -197.39,198.68
  Top Layer w6.8: -189.12,198.68 U1.H11@-154.6,198.68
  Top Layer w12: v3(-644.43,346.17) -646.66,343.88 S1.1@-587.43,343.88 ; C33.2@-246.51,-24.44 C33.2@-237.68,-24.44 ; C13.2@-246.51,214.63 C13.2@-251.41,210.87 ; v4@-194.74,18.5 v4(-192.93,16.69) ; -189.12,198.68 -197.39,198.68 -197.88,198.68 -228.79,167.78 -251.39,167.78 C12.2@-246.51,169.63 C13.2@-251.41,210.87 ; U1.H11@-154.6,198.68 -163.43,207.51 -204.58,207.51 -221.27,190.82 -250.94,190.82 C13.2@-251.37,210.87 ; v2(-104.28,319.87) -104.66,319.09 U1.L9@-91.61,293.17 ; v2(-11.3,-7.24) U1.B6@2.88,9.71 ; U1.E3@97.37,104.19 113.06,90.58 v2(112.11,89.48) ; U1.B1@160.36,9.71 176.93,9.71 v1(189.71,-3.08) ; U1.F1@160.36,135.69 193.17,135.69 v2(217.14,111.72) ; C55.1@298.62,64.2 265.69,63.17 v2(217.14,111.72) ; C60.2@298.61,110.35 298.31,111.72 v2(217.14,111.72) ; C59.2@307.7,-367.12 C25.2@307.7,-319.48 332.06,-319.48 339.02,-312.53 v4(341.54,-312.53) ; R15.1@308.49,-270.15 308.49,-272.24 v1(326.11,-288.03) v1@328.52,-285.61 ; R11.2@338.01,210.71 339.11,211.82 345.36,211.82 368.12,234.57 368.12,275.64 ccw(c347.12,275.64) 361.96,290.49 R8.2@338.52,313.94 ; C17.2@380.55,-355.01 380.55,-285.61 v1@328.52,-285.61 ; U4.10@383.86,-285.61 v1@328.52,-285.61 ; v4(491.41,122.7) 493.05,124.33 v4@492.49,124.33 ; v1(518.85,123.9) 550.8,124.33 U17.1@547.24,124.33 ; R14.1@600.6,-238.88 600.6,-239.36 559.66,-289.22 R92.2@559.66,-289.7 559.66,-291.28 587.55,-319.17 v4(622.5,-319.17) 669.01,-365.68 724.65,-365.68 724.65,-365.55 746.72,-343.49 v4@746.72,-350.01 ; C130.2@680.14,-383.38 688.89,-379.02 772.46,-379.02 C137.2@768.94,-376.88 ; U16.27@746.72,-320.3 v4@746.72,-350.01 ; v4(747.25,-350.93) 747.25,-376.64 772.46,-376.64 C137.2@768.94,-376.88 ; U18.1@922.32,110.61 922.32,111.67 965.22,111.67 C136.2@971.92,104.18 ; v4@746.72,-350.01 772.46,-375.76 C137.2@768.94,-376.88
  Top Layer w13.78: v4(-192.93,16.69) U1.C11@-154.6,41.2
  Top Layer w19.68: C33.2@-237.68,-24.44 v4@-194.74,18.5 ; v4@492.49,124.33 U17.1@550.8,124.33 ; v4(881.94,55.35) 922.32,95.73 U18.1@922.32,110.61
  Mid-Layer 4 w12: v4(-192.93,16.69) -112.49,-63.76 -28.56,-63.76 -11.3,-46.49 v2(-11.3,-7.24) ; v2(112.11,89.48) 143.54,120.92 217.14,120.92 ; v1(189.71,-3.08) 196.78,3.14 220.56,26.92 220.56,71.69 173.35,118.9 173.35,120.92 217.14,120.92 ; v2(217.14,111.72) 217.14,120.92
  Mid-Layer 4 w15: v4(-217.8,184.43) -253.53,184.43 -287.25,218.14 -287.25,321.03 -167.39,321.03 -149.31,339.11 -123.52,339.11 v2(-104.28,319.87)
  Bottom Layer w12: R59.2@-1062.95,281.57 -1062.22,280.83 -1062.22,246.74 v1(-1060.3,243.6) ; v1@-1058.86,243.6 v1(-1060.3,243.6) ; Q4.3@-1055.7,200.45 -1062.82,200.45 -1060.3,202.97 v1(-1060.3,243.6) ; C22.2@-1002.88,216.09 C22.2@-1002.33,215.55 ; v4(-774.53,-1.17) -774.53,-87.45 -777.7,-88.4 FB4.2@-781.89,-90.24 -761.13,-111 -724.23,-111 C51.2@-723.52,-110.28 ; v4(-765.48,30.03) -706.12,89.39 ; U9.16@-683.1,256.01 -652.94,286.17 C58.2@-647.05,316.43 ; v3(-644.43,346.17) -644.43,319.05 C58.2@-647.05,316.43 ; U9.1@-641.76,234.36 -641.76,305.25 C58.2@-647.05,316.43 ; R44.2@-582.21,126.67 -582.21,125.1 -592.03,115.28 -640.57,115.28 ; R26.1@-544.58,272.34 -543.25,272.34 -543.25,272.28 R26.1@-543.25,280.43 ; R25.1@-543.25,216.62 R26.1@-543.25,280.43 ; v4(-283.52,-112.51) -279.38,-112.51 C1.2@-260.84,-131.06 -267.85,-138.07 -181.88,-224.04 ; C24.2@-248.25,29.01 -205.25,29.01 v4(-192.93,16.69) -195.12,11.95 C16.2@-171.13,27.51 ; C26.2@-190.81,212.78 C26.2@-190.6,216.22 ; C23.2@-164.82,312.61 -164.82,317.69 -151.24,331.27 -115.68,331.27 v2(-104.28,319.87) ; R2.2@-126.76,-236.18 -126.77,-230.19 -167.03,-230.19 ; U2.8@-21.13,-208.46 -23.9,-204.12 -90.74,-204.12 ccw(c-90.74,-225.12) -105.59,-210.27 -125.51,-230.19 -167.03,-230.19 ; v2(112.11,89.48) 113.22,90.44 137,114.21 137,127.79 160.19,150.98 C14.2@171.87,152 R9.1@131.53,152 ; v1(189.71,-3.08) 238.6,-3.08 256.6,-21.08 C27.2@258.75,-15.42 259.11,25.87 R13.1@257.96,32.32 ; R7.2@299.27,152 R7.2@299.27,149.51 ; R10.2@299.27,251.8 323.09,227.98 cw(c308.24,213.13) 329.24,213.13 329.24,183.78 cw(c308.24,183.78) 323.09,168.93 ; R1.1@311.88,-250.67 R1.1@312.85,-257.13 312.85,-281.72 315.56,-284.44 321.07,-284.44 v1@323.9,-287.27 ; v4(341.54,-312.53) 340.76,-311.75 R3.1@312.27,-311.75 312.27,-287.15 v1@323.78,-287.15 ; v2(368.12,225.89) v2@368.12,222.66 ; 389.62,-219.45 368.41,-240.66 3V3.1@371.44,-275.44 353.83,-255.1 351.61,-255.1 v4(351.61,-287.69) 351.19,-287.27 v1@323.9,-287.27 ; C34.2@434.32,-219.45 C34.2@435.96,-221.09 ; v4(491.41,122.7) 498.19,115.92 v4@498.19,117.75 ; v4(853.68,56.84) 881.94,56.84 v4(881.94,55.35) 941.95,115.36 C29.2@941.96,129.94 ; U13.4@919.46,197.96 U13.4@910.4,197.96 ; U13.2@919.46,249.14 909.73,249.14 909.73,223.55 U13.3@919.46,223.55 910.4,223.55 U13.4@910.4,197.96 ; C29.2@941.96,129.94 941.96,149.22 910.4,180.78 U13.4@910.4,197.96 ; -706.12,89.39 cw(c-691.27,74.54) -691.27,95.54 ; -706.12,89.39 cw(c-691.27,74.54) -691.27,95.54 ; -691.27,95.54 -677.71,95.54 ; -677.71,95.54 ccw(c-677.71,116.54) -662.86,101.69 ; -677.71,95.54 ccw(c-677.71,116.54) -662.86,101.69 ; -662.86,101.69 -655.42,109.13 ; -655.42,109.13 cw(c-640.57,94.28) -640.57,115.28 ; -655.42,109.13 cw(c-640.57,94.28) -640.57,115.28 ; C58.2@-647.05,316.43 -643.92,316.43 -632.87,305.39 -576.91,305.39 cw(c-576.91,284.39) -562.06,299.24 R26.1@-543.25,280.43 ; -181.88,-224.04 ccw(c-167.03,-209.19) -167.03,-230.19 ; -181.88,-224.04 ccw(c-167.03,-209.19) -167.03,-230.19 ; 252.78,111.72 ccw(c252.78,132.72) 267.63,117.87 ; 252.78,111.72 ccw(c252.78,132.72) 267.63,117.87 ; 252.78,111.72 v2(217.14,111.72) 261.48,111.72 267.63,117.87 ; 267.63,117.87 R7.2@299.27,149.51 ; R7.2@299.27,149.51 303.66,149.51 323.09,168.93 ; 323.09,168.93 361.97,207.81 ; v1@323.78,-287.15 v1@323.9,-287.27 ; v1@323.78,-287.15 v1(326.11,-288.03) v1@323.9,-287.27 ; 361.97,207.81 ccw(c347.12,222.66) v2@368.12,222.66 ; 361.97,207.81 ccw(c347.12,222.66) v2@368.12,222.66
  Bottom Layer w19.68: v1@-1058.86,243.6 -1031.35,216.09 C22.2@-1002.88,216.09 ; C51.2@-723.52,-110.28 C28.2@-672.01,-110.28 ; U7.1@-388.61,-145.67 U7.4@-321.68,-145.67 ; v4(-217.8,184.43) C26.2@-190.81,212.78 ; R1.1@311.88,-250.67 C15.2@311.88,-200.8 ; v4@498.19,117.75 C132.2@557.34,117.75
  Bottom Layer w23.62: U7.4@-321.68,-145.67 C1.2@-267.85,-138.07 ; 389.62,-219.45 C34.2@434.32,-219.45
5V0: 5V0.1 C7.2 C32.1 C36.1 C37.2 C40.1 C43.2 C65.2 C66.2 C78.2 C79.2 C178.2 C179.2 D1.4 L2.2 P1.4 P3.7 P4.3 P5.3 R5.1 R33.1 U1.E10 U1.E11 U4.1 U4.2 U4.4 U11.6 U15.6 | length 4529
  Top Layer w12: v4(-1286.55,-272.78) -1286.23,-272.78 -1263.71,-295.29 C79.2@-1263.71,-302.13 -1263.71,-278.8 ; v4(-1286.32,-247.5) -1269.87,-263.95 ; R5.1@-851.95,-337.66 -851.95,-384.8 v4(-838.48,-392.35) ; v4(-821.99,-367.01) -821.99,-275.87 -811.6,-265.48 ; v4(-811.49,-393.27) -811.49,-265.6 -811.6,-265.48 ; P1.4@-486.22,322.73 -497.79,322.73 -497.79,203.77 ccw(c-476.79,203.77) -491.64,188.92 -468.39,165.67 L2.2@-468.39,104.88 ; L2.2@-414.32,102.38 -414.32,121.52 -484.25,121.52 -484.25,147.13 C43.2@-615.2,163.28 -615.2,172.46 -468.39,172.46 L2.2@-468.39,104.88 ; C40.1@-246.51,20.02 -246.57,27.7 -170.72,103.55 -154,103.55 -154.25,103.81 U1.E11@-154.96,103.81 ; C7.2@-246.51,64.27 -206.84,71.95 v2(-204.95,70.06) ; v2(-186.01,70.06) v2@-186.01,72.59 ; U1.E11@-154.6,104.19 U1.E11@-154.96,103.84 ; U1.E10@-123.11,104.19 -124.08,104.19 -134.86,93.41 -165.2,93.41 v2@-186.01,72.59 ; U4.2@505.91,-265.93 U4.1@505.91,-285.61 505.91,-315.26 506.73,-316.08 C36.1@506.73,-355.01 ; U4.4@505.91,-226.56 526.33,-226.56 547.8,-205.09 cw(c562.65,-219.94) 562.65,-198.94 v4(593.27,-198.94) 577.52,-183.18 cw(c592.37,-168.33) 571.37,-168.33 R33.1@571.37,-157.68 ; v4(526.54,-372.63) 522.29,-376.88 539.11,-376.88 C36.1@506.73,-355.01 ; v4(554.12,-375.08) 554.12,-361.33 C37.2@560.44,-355.01 C36.1@506.73,-355.01 ; v1(728.54,147.59) 728.54,186.99 718.5,197.02 P3.7@718.5,232.28 752.23,232.28 752.23,171.27 757.93,165.57 v4(757.93,147.24) ; v4(1490.5,-309.97) 1494.15,-306.32 v4@1521.93,-306.32 ; v4(1517.21,-311.04) v4@1521.93,-306.32 ; 5V0.1@1545.81,-306.32 v4@1521.93,-306.32 ; -1269.87,-263.95 cw(c-1284.71,-278.8) -1263.71,-278.8 ; -1269.87,-263.95 cw(c-1284.71,-278.8) -1263.71,-278.8 ; -811.6,-265.48 -588.62,-42.5 -588.62,42.96 -519.34,112.24 L2.2@-468.39,104.88 ; v2@-186.01,72.59 -155.55,103.05 -155.55,103.16 U1.E11@-154.96,103.81
  Top Layer w19.68: L2.2@-414.32,102.38 v1(-324.56,102.38)
  Mid-Layer 4 w12: v2(-204.95,70.06) v2(-186.01,70.06) ; P5.3@1473.46,317.13 1434.79,278.46 1434.79,142.87 1498.94,78.72 1498.94,-10.49 1539.97,-51.52 1539.97,-129.5 1450.15,-219.32 1450.15,-266.26 1451.74,-267.85 1451.74,-271.2 v4(1490.5,-309.97)
  Bottom Layer w12: v4(-1286.55,-272.78) -1272.13,-272.78 ; v4(-1286.32,-247.5) C78.2@-1272.13,-221.44 ; C78.2@-1270.65,-223.77 C78.2@-1272.13,-221.44 ; U11.6@-1257.87,-276.6 -1267.44,-263.35 -1272.13,-272.78 ; D1.4@-529.5,-365.46 -516.61,-365.46 -460.15,-308.99 ccw(c-475,-294.14) -454,-294.14 v1(-454,-269.49) ; v1(-324.56,102.38) -324.56,87.25 -308.83,71.52 v2@-190.42,71.52 ; v2(-204.95,70.06) -235.88,100.99 C66.2@-248.72,100.99 -216.94,100.99 v2@-190.42,71.52 ; v2(-186.01,70.06) v2@-190.42,71.52 ; 514.7,-372.39 526.3,-372.39 v4(526.54,-372.63) ; C65.2@514.7,-314.68 575,-314.68 575,-274.45 574.4,-273.85 620.3,-242.44 v5(623.88,-242.44) v4(593.27,-198.94) ; v4(757.93,147.24) 773,132.17 780.86,132.17 C32.1@783.09,129.94 ; v4(1490.5,-309.97) 1490.5,-277.2 1510.42,-277.2 U15.6@1512.62,-275 1512.62,-306.05 1517.21,-310.65 v4(1517.21,-311.04) ; C179.2@1548.07,-362.77 1518.1,-332.8 1518.1,-311.92 v4(1517.21,-311.04) ; C178.2@1548.07,-318.64 1548.07,-317.11 1541.99,-311.04 v4(1517.21,-311.04) ; -1272.13,-272.78 C78.2@-1272.13,-221.44
  Bottom Layer w19.68: 514.7,-372.39 C65.2@514.7,-314.68
AD0: R76.2 U1.K7 U9.4 | length 768.1
  Top Layer w5.6: v2(-42.89,278.98) U1.K7@-28.62,261.67
  Bottom Layer w5.6: U9.4@-641.76,175.3 -641.76,176.88 -630.78,176.88 ccw(c-630.78,186.68) -629.52,176.96 -618.82,178.34 cw(c-617.56,168.63) -617.56,178.43 -497.34,178.43 ccw(c-497.34,188.23) -490.41,181.3 -456.65,215.05 R76.2@-456.65,216.62 -435.87,217.05 ccw(c-435.87,226.85) -428.94,219.92 -415.09,233.77 cw(c-408.16,226.84) -408.16,236.64 -360.04,236.64 ccw(c-360.04,246.44) -353.11,239.51 -224.88,367.74 cw(c-217.95,360.81) -217.95,370.61 -85.68,370.61 cw(c-85.68,360.81) -78.75,367.74 -62.31,351.3 cw(c-69.24,344.37) -59.44,344.37 -59.44,311.2 ccw(c-49.64,311.2) -56.57,304.28 -49.93,297.63 cw(c-56.86,290.71) -47.06,290.71 -47.06,287.2 ccw(c-37.26,287.2) -44.19,280.27 v2(-42.89,278.98)
ADDR_CTL: R98.2 U1.D1 U8.G7 | length 2166.8
  Top Layer w5.6: U1.D1@160.36,72.7 176.33,72.7 ; v2(190.76,62.32) 183.26,69.83 ; 176.33,72.7 cw(c176.33,62.9) 183.26,69.83 ; 176.33,72.7 cw(c176.33,62.9) 183.26,69.83
  Top Layer w6: v1(-1101.87,117.28) -1099.83,116.33 U8.G7@-1082.68,98.43
  Mid-Layer 2 w5.6: v1(-1101.87,117.28) -1100.48,115.68 -1116.54,99.61 ; v2(190.76,62.32) 183.08,70 ; -1146.21,-161.93 ccw(c-1136.41,-161.93) -1143.34,-168.86 ; -1146.21,-161.93 ccw(c-1136.41,-161.93) -1143.34,-168.86 ; -1146.21,-161.93 -1146.21,-134.19 ; -1146.21,-134.19 cw(c-1136.41,-134.19) -1143.34,-127.26 ; -1146.21,-134.19 cw(c-1136.41,-134.19) -1143.34,-127.26 ; -1143.34,-168.86 -1134.61,-177.59 ; -1143.34,-127.26 -1128.08,-112 ; -1134.61,-177.59 ccw(c-1127.68,-170.66) -1127.68,-180.46 ; -1134.61,-177.59 ccw(c-1127.68,-170.66) -1127.68,-180.46 ; -1128.08,-112 ccw(c-1135.01,-105.07) -1125.21,-105.07 ; -1128.08,-112 ccw(c-1135.01,-105.07) -1125.21,-105.07 ; -1127.68,-180.46 -1061.22,-180.46 ; -1125.21,-105.07 -1125.21,20 ; -1125.21,20 cw(c-1115.41,20) -1122.34,26.93 ; -1125.21,20 cw(c-1115.41,20) -1122.34,26.93 ; -1122.34,26.93 -1122.28,26.99 ; -1122.28,26.99 ccw(c-1129.21,33.92) -1119.41,33.92 ; -1122.28,26.99 ccw(c-1129.21,33.92) -1119.41,33.92 ; -1119.41,33.92 -1119.41,92.69 ; -1119.41,92.69 cw(c-1109.61,92.69) -1116.54,99.61 ; -1119.41,92.69 cw(c-1109.61,92.69) -1116.54,99.61 ; -1061.22,-180.46 ccw(c-1061.22,-170.66) -1054.29,-177.59 ; -1061.22,-180.46 ccw(c-1061.22,-170.66) -1054.29,-177.59 ; -1054.29,-177.59 -1023.26,-146.55 ; -1023.26,-146.55 cw(c-1016.33,-153.48) -1016.33,-143.68 ; -1023.26,-146.55 cw(c-1016.33,-153.48) -1016.33,-143.68 ; -1016.33,-143.68 -804.9,-143.68 ; -804.9,-143.68 cw(c-804.9,-153.48) -797.97,-146.55 ; -804.9,-143.68 cw(c-804.9,-153.48) -797.97,-146.55 ; -797.97,-146.55 -771.56,-172.97 ; -771.56,-172.97 ccw(c-764.63,-166.04) -764.63,-175.84 ; -771.56,-172.97 ccw(c-764.63,-166.04) -764.63,-175.84 ; -764.63,-175.84 -662.12,-175.84 ; -662.12,-175.84 ccw(c-662.12,-166.04) -655.19,-172.97 ; -662.12,-175.84 ccw(c-662.12,-166.04) -655.19,-172.97 ; -655.19,-172.97 -648.09,-165.87 ; -648.09,-165.87 cw(c-641.16,-172.8) -641.16,-163 ; -648.09,-165.87 cw(c-641.16,-172.8) -641.16,-163 ; -641.16,-163 -591.87,-163 ; -591.87,-163 ccw(c-591.87,-153.2) -584.94,-160.13 ; -591.87,-163 ccw(c-591.87,-153.2) -584.94,-160.13 ; -584.94,-160.13 -576.66,-151.85 ; -576.66,-151.85 cw(c-569.73,-158.78) -569.73,-148.98 ; -576.66,-151.85 cw(c-569.73,-158.78) -569.73,-148.98 ; -569.73,-148.98 -504.43,-148.98 -481.09,-148.88 ; -481.09,-148.88 ccw(c-481.09,-139.08) -474.16,-146.01 ; -481.09,-148.88 ccw(c-481.09,-139.08) -474.16,-146.01 ; -474.16,-146.01 -345.83,-17.69 ; -345.83,-17.69 cw(c-338.9,-24.62) -338.9,-14.82 ; -345.83,-17.69 cw(c-338.9,-24.62) -338.9,-14.82 ; -338.9,-14.82 -245.14,-14.82 ; -245.14,-14.82 ccw(c-245.14,-5.02) -238.21,-11.95 ; -245.14,-14.82 ccw(c-245.14,-5.02) -238.21,-11.95 ; -238.21,-11.95 -236.62,-10.36 ; -236.62,-10.36 cw(c-229.69,-17.29) -229.69,-7.49 ; -236.62,-10.36 cw(c-229.69,-17.29) -229.69,-7.49 ; -229.69,-7.49 -188.21,-7.49 ; -188.21,-7.49 ccw(c-188.21,2.31) -181.28,-4.62 ; -188.21,-7.49 ccw(c-188.21,2.31) -181.28,-4.62 ; -181.28,-4.62 -160.22,16.45 ; -160.22,16.45 ccw(c-167.15,23.38) -157.35,23.38 ; -160.22,16.45 ccw(c-167.15,23.38) -157.35,23.38 ; -157.35,23.38 -157.35,26.95 ; -157.35,26.95 cw(c-147.55,26.95) -154.48,33.88 ; -157.35,26.95 cw(c-147.55,26.95) -154.48,33.88 ; -154.48,33.88 -119.03,69.33 ; -119.03,69.33 cw(c-112.1,62.4) -112.1,72.2 ; -119.03,69.33 cw(c-112.1,62.4) -112.1,72.2 ; -112.1,72.2 -93.71,72.2 -91.78,74.14 ; -91.78,74.14 cw(c-84.85,67.21) -84.85,77.01 ; -91.78,74.14 cw(c-84.85,67.21) -84.85,77.01 ; -84.85,77.01 91.6,77.01 92.86,75.74 ; 92.86,75.74 ccw(c99.79,82.67) 99.79,72.87 ; 92.86,75.74 ccw(c99.79,82.67) 99.79,72.87 ; 99.79,72.87 176.15,72.87 ; 176.15,72.87 cw(c176.15,63.07) 183.08,70 ; 176.15,72.87 cw(c176.15,63.07) 183.08,70
  Bottom Layer w5.6: v1(-1101.87,117.28) -1096.17,122.98 cw(c-1089.24,116.05) -1089.24,125.85 -1040.36,125.85 ccw(c-1040.36,135.65) -1033.43,128.72 -1003.12,159.03 R98.2@-1003.12,160.6
AGND: C63.1 C64.1 C69.1 C70.1 C85.1 U8.C7 U8.F6 | length 700
  Top Layer w5.6: v1(-1101.69,-79.79) -1099.68,-80.44 -1078.35,-59.12 -1080.08,-60.84 U8.C7@-1082.68,-59.06
  Top Layer w12: v1(-1101.69,-79.79) -1099.69,-78.38 -1048.65,-27.34 -1048.65,2.76 -1043.31,8.1 U8.F6@-1043.31,59.06 v1(-1062.68,78.63)
  Bottom Layer w12: C64.1@-1272.74,111.65 -1264.34,127.13 -1263.3,120.52 C64.1@-1263.3,101.95 ; v1@-1236.08,127.13 -1235.77,127.43 v1(-1235.08,127.43) ; C63.1@-1093.79,-111.49 -1095.39,-109.88 -1098.42,-109.88 -1098.42,-83.06 v1(-1101.69,-79.79) -1079.62,-57.72 C69.1@-1079.62,-56.73 ; C69.1@-1079.62,-56.73 -1079.09,-56.19 C69.1@-1079.09,-46.39 -1079.09,-0.19 C85.1@-1080.49,1.21 -1080.49,45.32 C70.1@-1078.39,45.32 -1078.39,58.9 -1062.68,74.62 v1(-1062.68,78.63) -1044.85,60.8 -1044.85,-20.96 -1079.62,-55.74 C69.1@-1079.62,-56.73
  Bottom Layer w19.68: C64.1@-1264.34,127.13 v1@-1236.08,127.13 ; C64.1@-1263.3,101.95 v1(-1235.08,101.95)
AGNDR: C163.1 C164.1 C169.1 C183.1 C184.1 C185.1 U10.C7 U10.F6 | length 800.9
  Top Layer w12: v1(1219.16,78.18) U10.F6@1240.16,59.06 U10.F6@1238.03,57.68 ; 1238.03,-21.06 U10.F6@1238.03,57.68 ; v1(1259.15,76.58) 1256.93,76.58 U10.F6@1238.03,57.68
  Top Layer w15.75: v1(1181.94,-77.12) U10.C7@1200.79,-59.06 1238.03,-21.06
  Mid-Layer 1 w12: v3(1045.44,-125.02) 1090.12,-80.34 1090.12,17.27 1052.75,54.64 v1(1052.21,54.64)
  Bottom Layer w12: C164.1@1041.83,-99.62 v3(1045.44,-125.02) 1056.31,-99.62 C164.1@1056.31,-93.97 ; v1(1052.21,54.64) 1066.62,54.64 1104.34,16.92 C183.1@1104.34,15.26 ; C185.1@1160.58,-24.11 C169.1@1210.62,-24.11 ; C184.1@1176.98,-102.44 1181.94,-97.49 v1(1181.94,-77.12) ; C169.1@1206.84,-23.95 1210.51,-23.95 C169.1@1210.62,-24.11 ; C169.1@1215.17,-24.9 1214.33,-24.06 C169.1@1210.62,-24.11 ; v1(1219.16,78.18) 1220.76,76.58 v1(1259.15,76.58)
  Bottom Layer w19.68: v1(1181.94,-77.12) 1179.79,-70.36 1206.84,-43.31 C169.1@1206.84,-23.95
  Bottom Layer w23.62: C169.1@1206.84,-23.95 1207.78,-24.9 1215.17,-24.9 1254.19,-24.9 C163.1@1255.02,-24.11